# Altium PCB Localization.PcbDoc (part 1 of 2)
Units mil, origin at the board's own origin, x right, y up, seen from the top; angles counter-clockwise.
Board outline 3937.01 x 3937.01 mil, 4 copper layers (Top Layer, GND, POWER, GND_2), stack 23.756 mil thick; 104 components, 64 nets, 363 pads, 70 vias.
Unrouted connection lines stored in the file: 17.
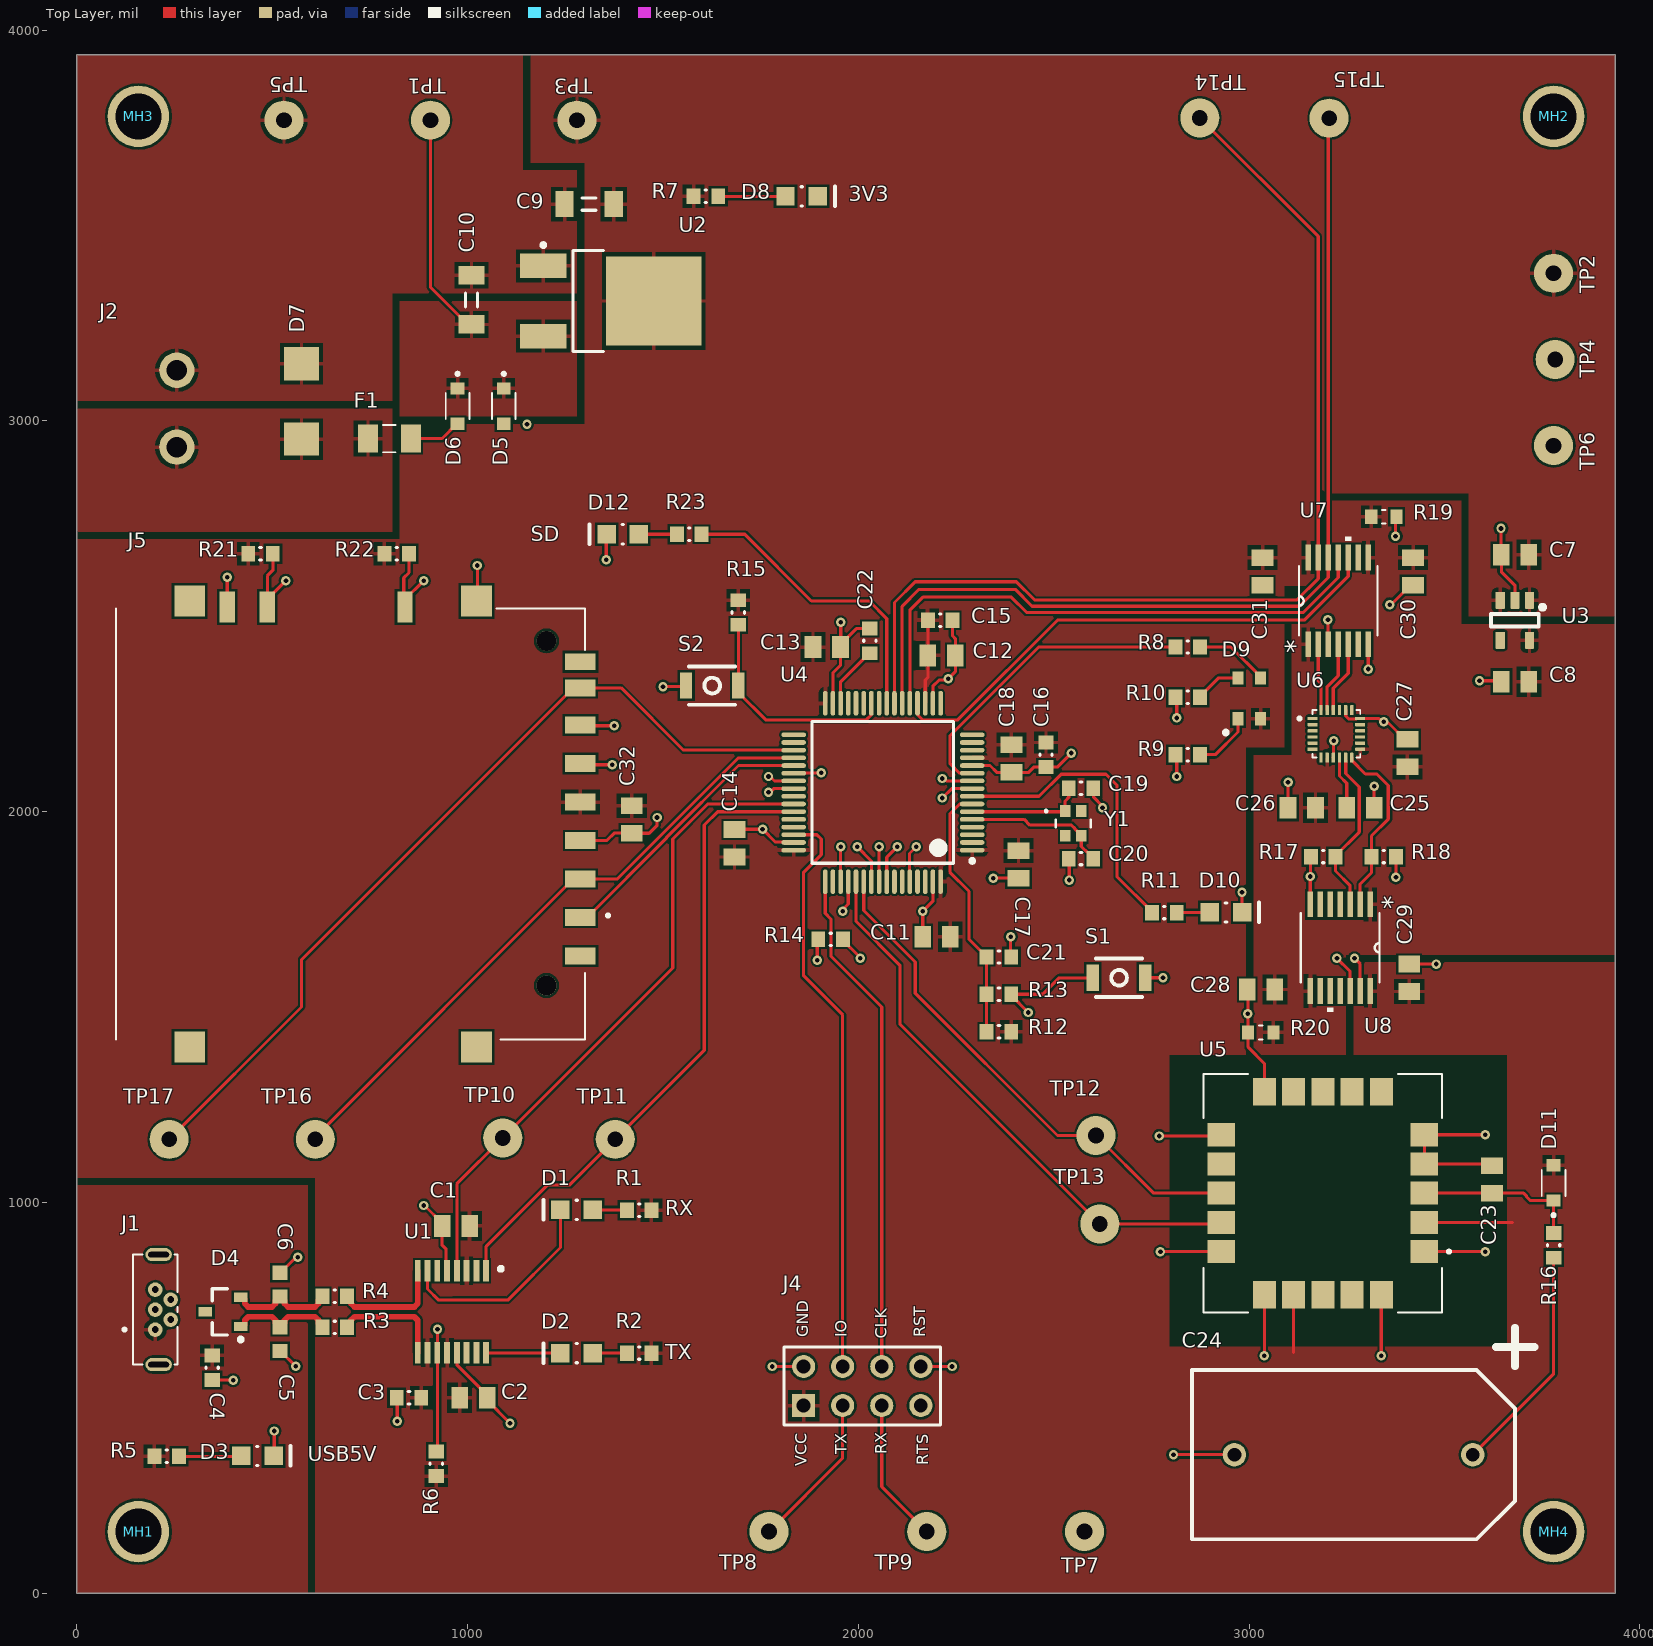
[diagram p0: Top Layer view]
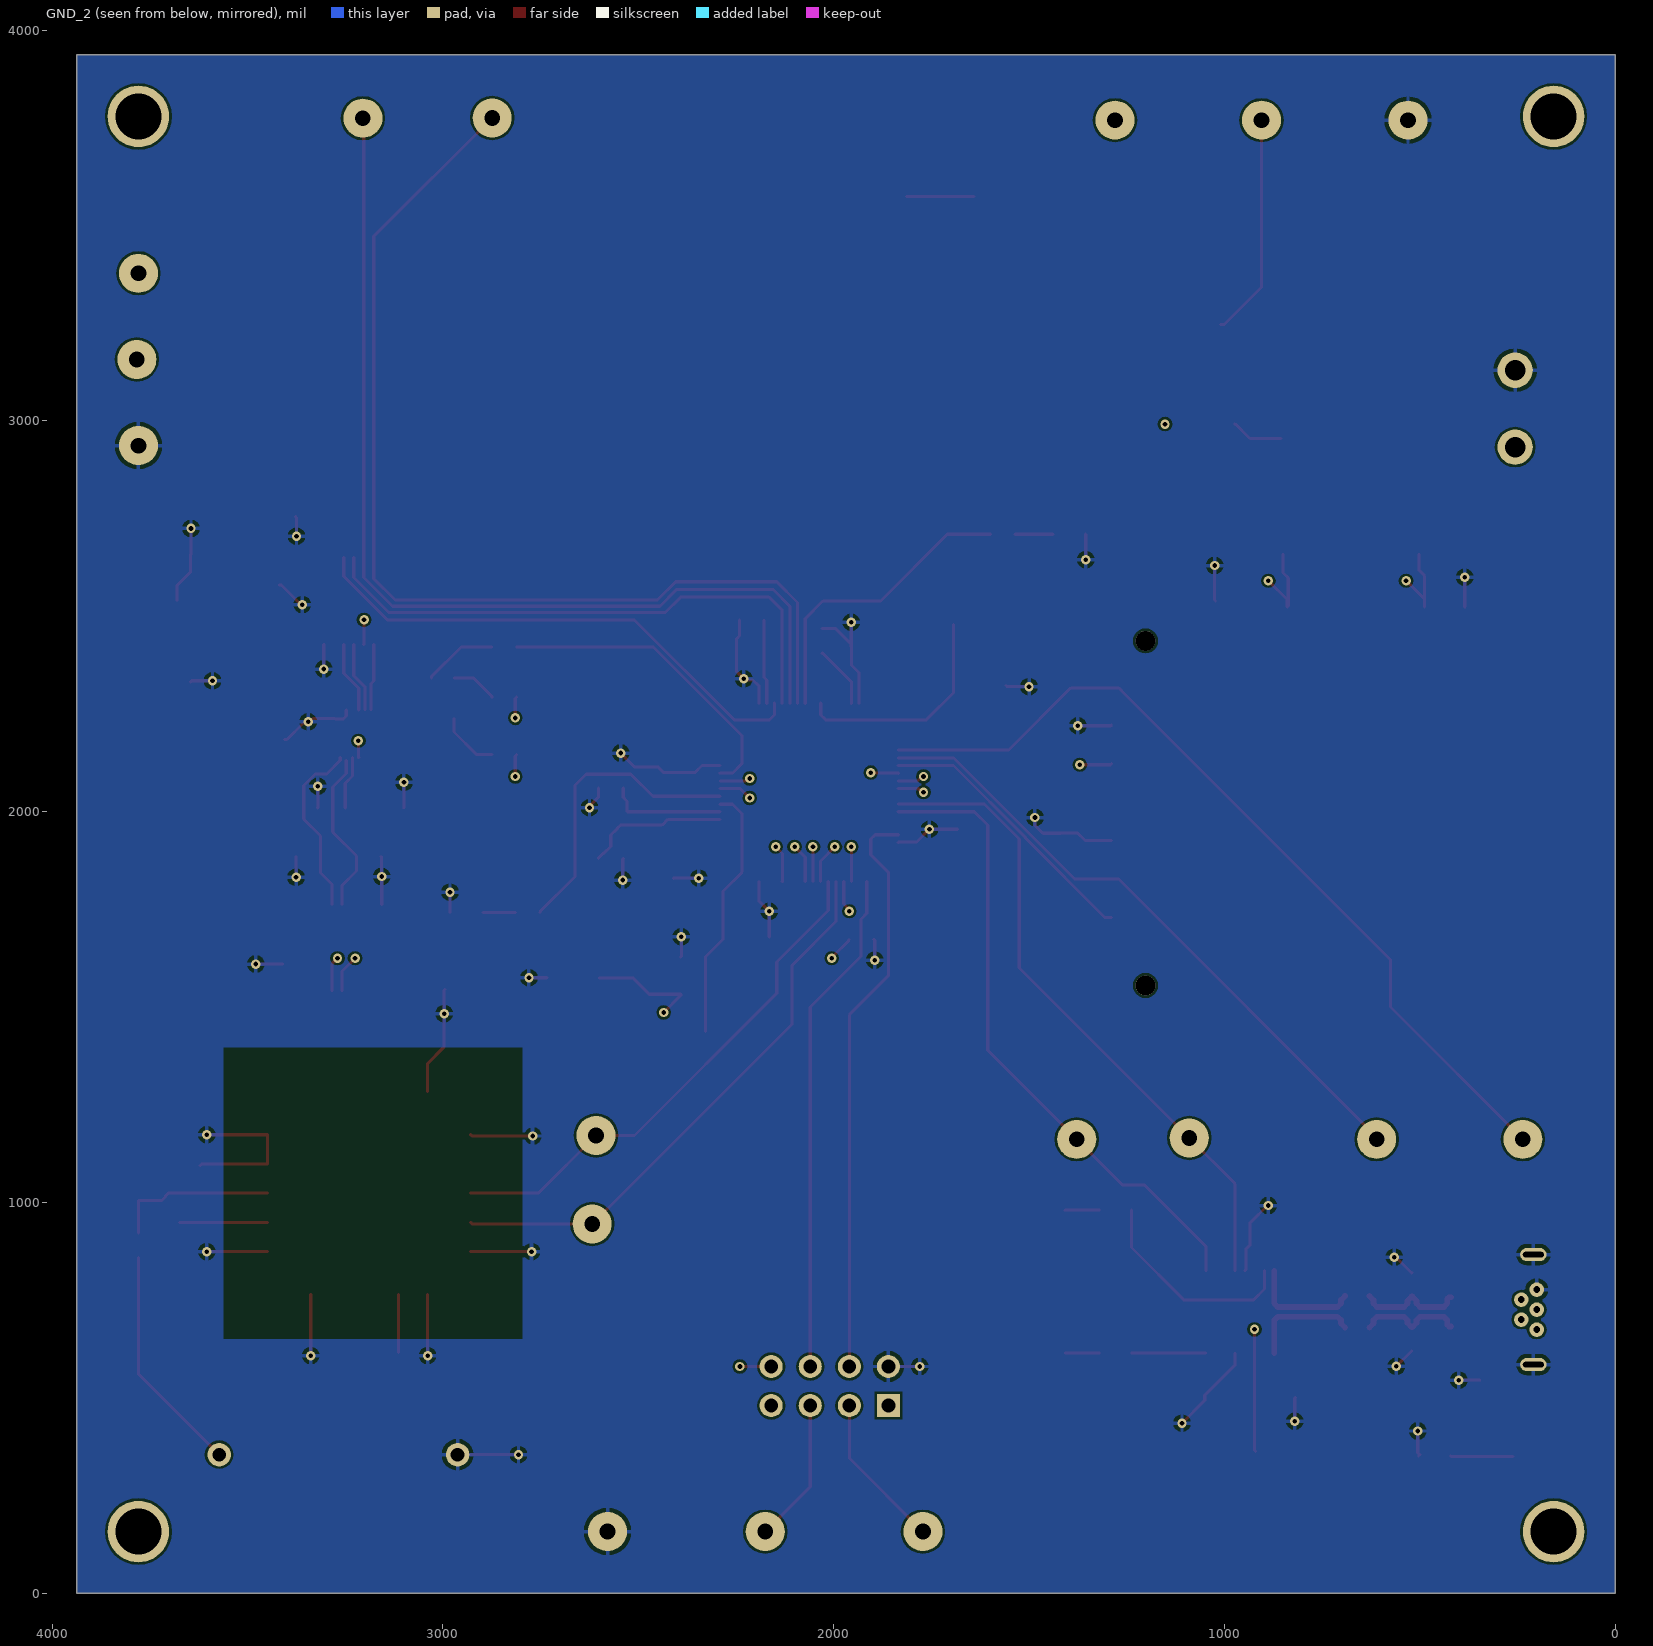
[diagram p1: GND_2 view, seen from below]
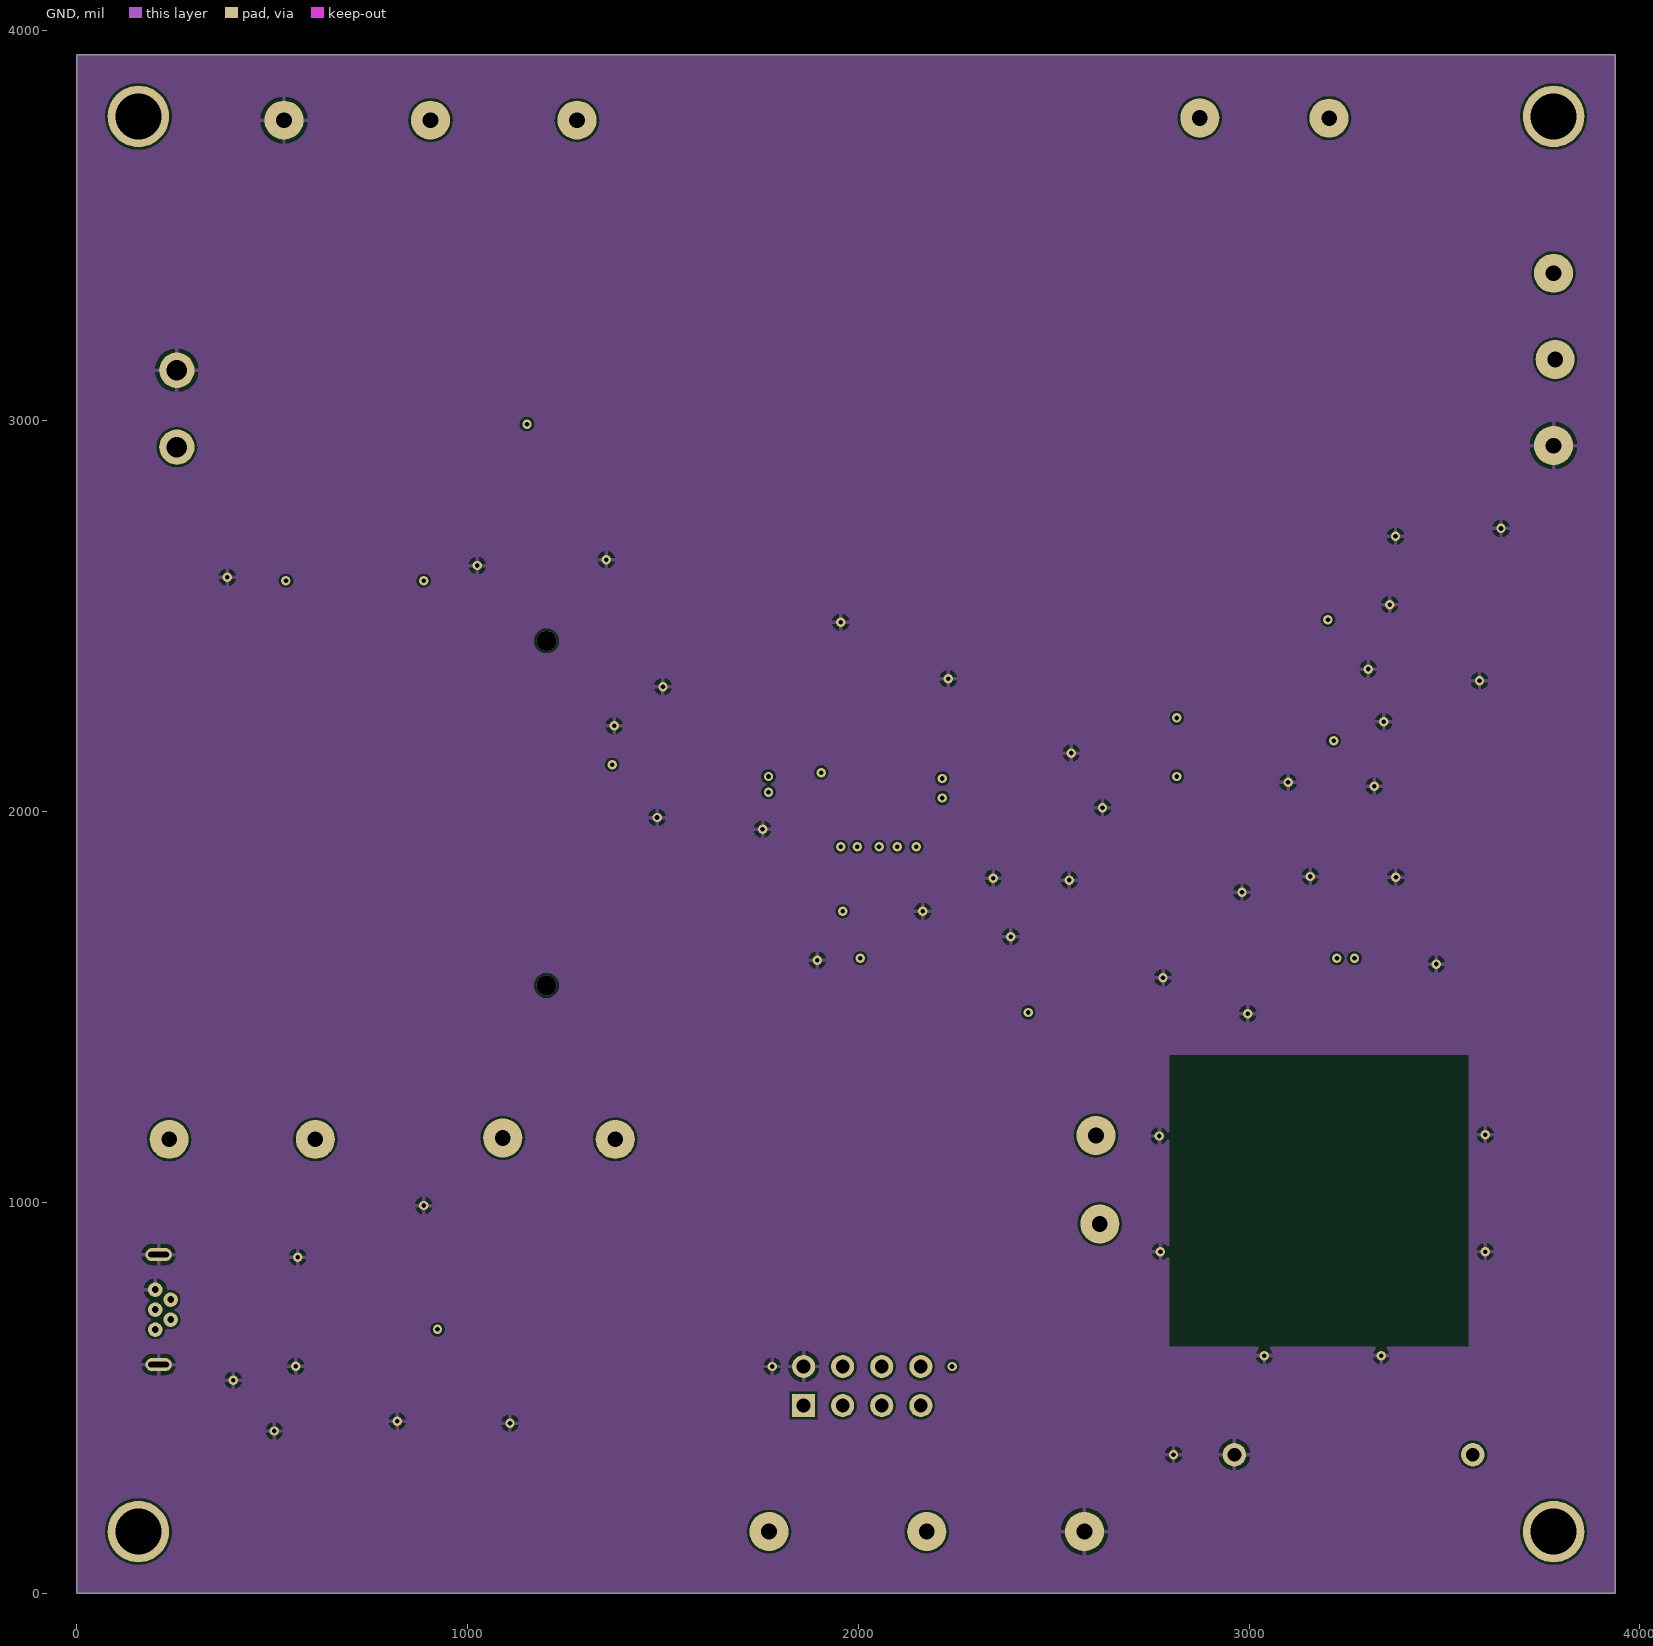
[diagram p2: GND]
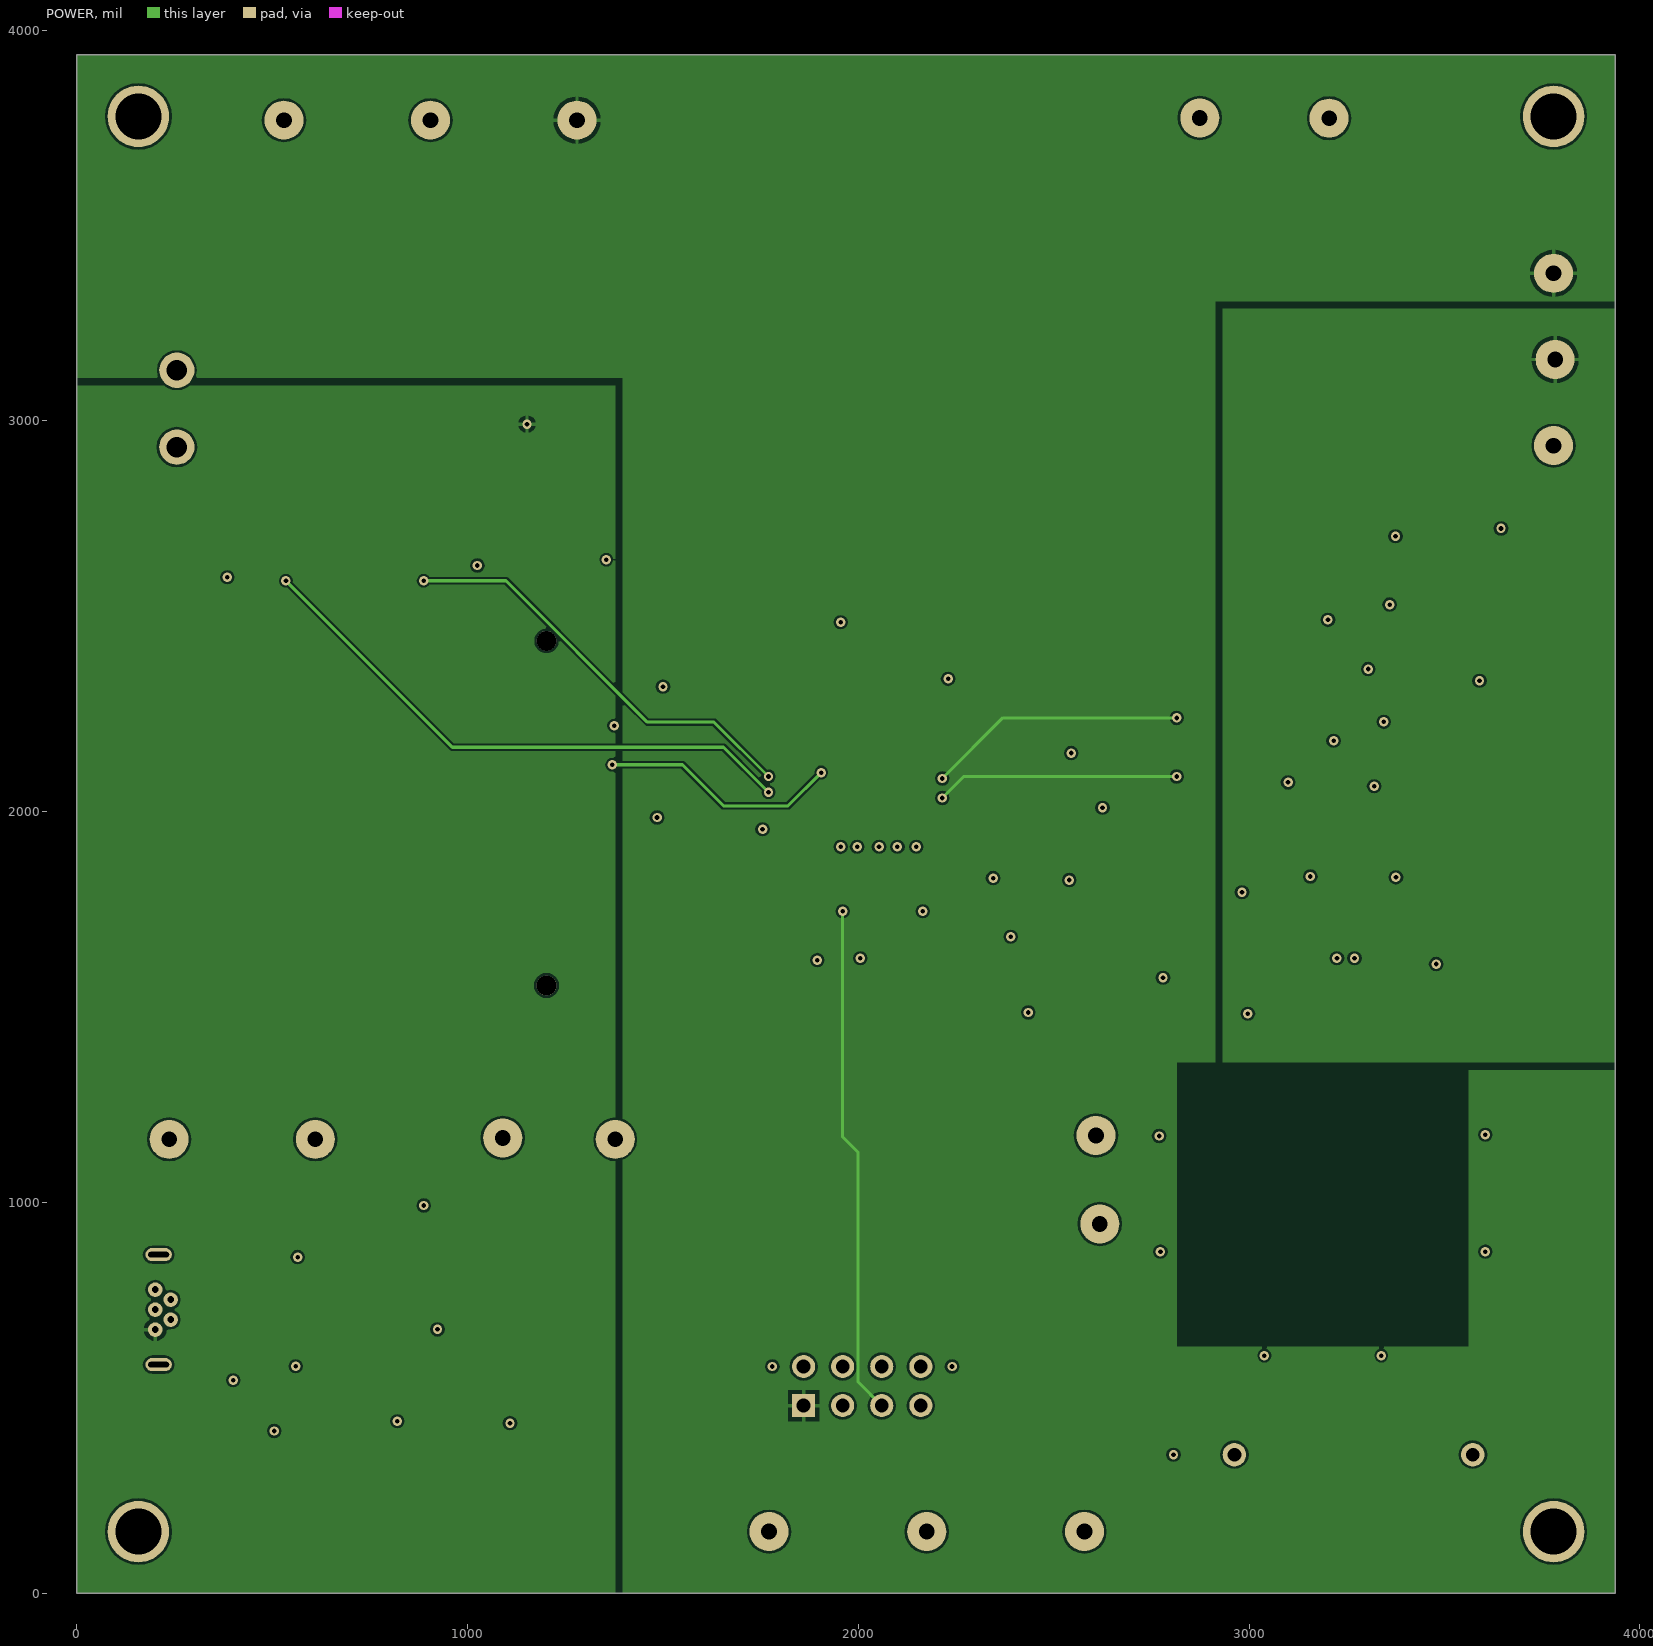
[diagram p3: POWER]
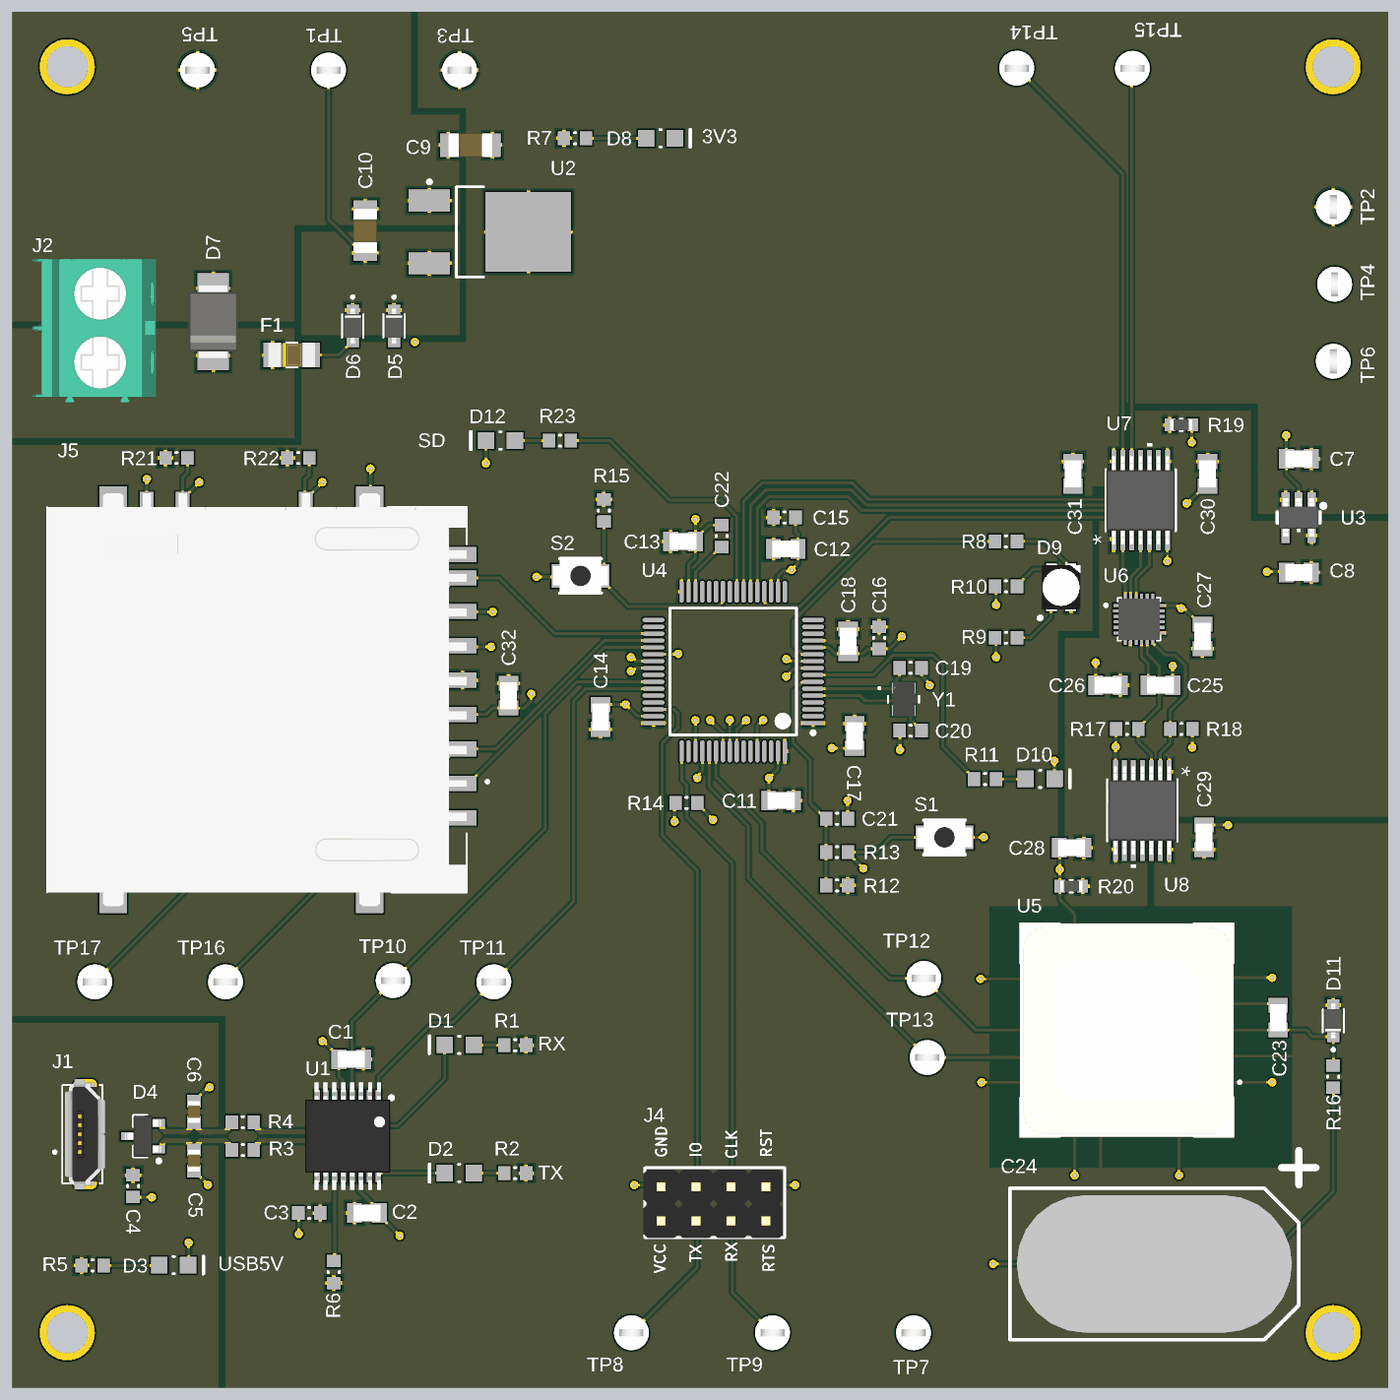
[diagram p4: 3D render of the assembled board from above, using the file's embedded part models]

## Layer stack, top to bottom
Top Solder: solder mask 0.4, Solder Resist, Dk 3.5
Top Layer: signal copper 1.4
Dielectric 2: prepreg 2.8, PP-006, Dk 4.1
GND: signal copper 1.378
Dielectric 1: dielectric 12.6, FR-4, Dk 4.8
POWER: signal copper 1.378
Dielectric 3: prepreg 2.8, PP-006, Dk 4.1
GND_2: signal copper 1.4
Bottom Solder: solder mask 0.4, Solder Resist, Dk 3.5

## Board outline
0,0 3937.01,0 3937.01,3937.01 0,3937.01

## Design rules (kind name [scope] priority, off if disabled: settings)
Clearance [All] p1: gap=6 ignorepadtopadclearanceinfootprint=FALSE
DiffPairsRouting [All] p1: maxlimit=10 minlimit=10 mostfreqgap=10 toplayer_minwidth=15 toplayer_maxwidth=15 toplayer_prefwidth=15 midlayer1_minwidth=15 midlayer1_maxwidth=15 midlayer1_prefwidth=15 midlayer2_minwidth=15 midlayer2_maxwidth=15 midlayer2_prefwidth=15 bottomlayer_minwidth=15 bottomlayer_maxwidth=15 bottomlayer_prefwidth=15 maxuncoupledlength=500
PolygonConnect [All] p1: connectstyle=Relief reliefconductorwidth=10 reliefentries=4 polygonreliefangle="90 Angle" airgapwidth=10
RoutingVias [All] p1: holewidth=28 width=50 viastyle="Through Hole" minholewidth=28 minwidth=50 maxholewidth=28 maxwidth=50
SolderMaskExpansion [All] p1: expansion=4 istentingtop=FALSE
Width [All] p1: maxlimit=8 minlimit=8 preferedwidth=8 minimp=50.000000 maximp=50.000000 favimp=50.000000
29 further rules are at their usual default settings.

## Classes and differential pairs
component class USB: C1 C2 C3 C4 C5 C6 D1 D2 D3 D4 J1 R1 R2 R3 R4 R5 R6 U1
component class SD_CARD: C32 D12 J5 R21 R22 R23 TP16 TP17
component class Power: C7 C8 C9 C10 D5 D6 D7 D8 F1 J2 R7 TP1 TP3 TP4 TP5 U2 U3
component class MCU: C11 C12 C13 C14 C15 C16 C17 C18 C19 C20 C21 C22 D9 D10 J4 MH1 MH2 MH3 MH4 R8 R9 R10 R11 R12 R13 R14 R15 S1 S2 TP5 TP6 TP8 TP9 TP10 TP11 U4 Y1
component class IMU: C25 C26 C27 C28 C29 C30 C31 R17 R18 R19 R20 TP14 TP15 U6 U7 U8
component class GPS: C23 C24 D11 R16 TP12 TP13 U5
differential pair USBD: +USBD_P -USBD_N
differential pair USBD_R: +USBD_R_P -USBD_R_N

## Components (designator, comment, footprint, x,y, rotation, side; value= is the part's Value field where it differs from the comment)
C1 "CAP_0.1uF_50V_0805" CAPC2012X140N 970,940 r0 top value=0.1uF
C2 "CAP_0.1uF_50V_0805" CAPC2012X140N 1014.92,500 r180 top value=0.1uF
C3 "CAP_4.7uF_0603" CAPC0603(1608)55_N 850,500 r180 top value=4.7uF
C4 "CAP_10nF_0603" CAPC0603(1608)55_N 346,577 r270 top value=10nF
C5 "CAP_47pF_100V_0603" CAPC1608X87N 520,650 r90 top value=47pF
C6 "CAP_47pF_100V_0603" CAPC1608X87N 520,789.49 r90 top value=47pF
C7 "CAP_0.1uF_50V_0805" CAPC2012X140N 3681.1,2657.48 r0 top value=0.1uF
C8 "CAP_0.1uF_50V_0805" CAPC2012X140N 3681.1,2332.68 r0 top value=0.1uF
C9 "10uF" CAPC1206(3216) 1311.02,3555.12 r0 top
C10 "10uF" CAPC1206(3216) 1010,3310 r270 top
C11 "CAP_0.1uF_50V_0805" CAPC2012X140N 2200,1680 r0 top value=0.1uF
C12 "CAP_0.1uF_50V_0805" CAPC2012X140N 2213.27,2400 r180 top value=0.1uF
C13 "CAP_0.1uF_50V_0805" CAPC2012X140N 1919.29,2421.26 r180 top value=0.1uF
C14 "CAP_0.1uF_50V_0805" CAPC2012X140N 1683.07,1919.29 r270 top value=0.1uF
C15 "CAP_4.7uF_0603" CAPC0603(1608)55_N 2209.53,2490 r180 top value=4.7uF
C16 "CAP_1uF_16V_0603" CAPC0603(1608)55_N 2480.32,2145.67 r90 top value=1uF
C17 "CAP_0.1uF_50V_0805" CAPC2012X140N 2410,1865 r90 top value=0.1uF
C18 "CAP_0.1uF_50V_0805" CAPC2012X140N 2391.73,2135.83 r90 top value=0.1uF
C19 "CL10C140JB8NNNC" CAPC0603(1608)55_N 2570,2060 r180 top value=14pF
C20 "CL10C140JB8NNNC" CAPC0603(1608)55_N 2570,1880 r0 top value=14pF
C21 "CAP_4.7uF_0603" CAPC0603(1608)55_N 2360,1628.19 r180 top value=4.7uF
C22 "CAP_4.7uF_0603" CAPC0603(1608)55_N 2029.7,2437.06 r270 top value=4.7uF
C23 "CAP_0.1uF_50V_0805" CAPC2012X140N 3622.05,1058.86 r270 top value=0.1uF
C24 "CAP_2.5F_5V" SCMS22C255PRBA0 3267.72,354.33 r180 top
C25 "CAP_0.1uF_50V_0805" CAPC2012X140N 3285.24,2010 r0 top value=0.1uF
C26 "CAP_0.1uF_50V_0805" CAPC2012X140N 3135,2010 r0 top value=0.1uF
C27 "CAP_0.1uF_50V_0805" CAPC2012X140N 3405.51,2149.8 r270 top value=0.1uF
C28 "CAP_0.1uF_50V_0805" CAPC2012X140N 3030.79,1544.8 r0 top value=0.1uF
C29 "CAP_0.1uF_50V_0805" CAPC2012X140N 3410,1575 r270 top value=0.1uF
C30 "CAP_0.1uF_50V_0805" CAPC2012X140N 3420,2615 r90 top value=0.1uF
C31 "CAP_0.1uF_50V_0805" CAPC2012X140N 3034.84,2615 r90 top value=0.1uF
C32 "CAP_0.1uF_50V_0805" CAPC2012X140N 1420,1980 r90 top value=0.1uF
D1 "DIO_LED_G" LED_0805_LINE 1279.06,981 r180 top
D2 "DIO_LED_Y" LED_0805_LINE 1279.06,614.21 r180 top
D3 "DIO_LED_R" LED_0805_LINE 462.05,351.07 r0 top
D4 "TVS_DIODE_USB_5.5V" SOT23-3 374,720 r180 top
D5 "DIO_SCHOTTKY_30V_800mA" DIO_CUS520,H3F 1092.52,3038.03 r270 top
D6 "DIO_SCHOTTKY_30V_800mA" DIO_CUS520,H3F 974.41,3038.03 r270 top
D7 "TVS_DIODE_BIDIRECTIONAL" TVS_DIODE_BIDIRECTIONAL 575,3050 r90 top
D8 "DIO_LED_G" LED_0805_LINE 1855,3575 r0 top
D9 "LED_RGB" LED_RGB 3000.67,2290.23 r0 top
D10 "DIO_LED_G" LED_0805_LINE 2940.94,1742.13 r0 top
D11 "DIO_SCHOTTKY_30V_800mA" DIO_CUS520,H3F 3779.53,1050 r90 top
D12 "DIO_LED_G" LED_0805_LINE 1397.17,2710 r180 top
F1 "FUSE_1A_1206" FUSC3215X78N 800,2955 r0 top
J1 "614105150721" USB_CON 200.63,725.59 r90 top
J2 "CON_2M_TERM" 1935161 255.91,3031.5 r270 top
J4 "HEADER 4X2" HEADER_2X4 1860,480 r0 top
J5 "SD_CARD_CON" HRS_DM1AA-SF-PEJ(21) 700,2000 r270 top
MH1 "MOUNTING_HOLES" MOUNTING_HOLE#1 157.48,157.48 r0 top
MH2 "MOUNTING_HOLES" MOUNTING_HOLE#2 3818.9,3818.9 r0 top
MH3 "MOUNTING_HOLES" MOUNTING_HOLE#1 157.48,3779.53 r0 top
MH4 "MOUNTING_HOLES" MOUNTING_HOLE#1 3779.53,157.48 r0 top
R1 "RES_1K_0603" RESC0603(1608)_N 1439.06,980 r0 top value=1K
R2 "RES_1K_0603" RESC0603(1608)_N 1439.06,614.21 r0 top value=1K
R3 "RES_27R_0603" RESC0603(1608)_N 660,680 r0 top
R4 "RES_27R_0603" RESC0603(1608)_N 660,760 r0 top
R5 "RES_1K_0603" RESC0603(1608)_N 230,350 r180 top value=1K
R6 "RES_10K_0603" RESC0603(1608)_N 920,330.94 r270 top value=10K
R7 "RES_120R_0603" RESC0603(1608)_N 1610,3575 r180 top value=120
R8 "RES_20R_0603" RESC0603(1608)_N 2843.27,2421.54 r180 top value=20R
R9 "RES_120R_0603" RESC0603(1608)_N 2843.27,2145.95 r0 top value=120
R10 "RES_20R_0603" RESC0603(1608)_N 2843.27,2293.06 r180 top value=20R
R11 "RES_120R_0603" RESC0603(1608)_N 2783.46,1741.65 r0 top value=120
R12 "RES_10K_0603" RESC0603(1608)_N 2360,1437.01 r0 top value=10K
R13 "RES_1K_0603" RESC0603(1608)_N 2360,1532.6 r180 top value=1K
R14 "RES_10K_0603" RESC0603(1608)_N 1929.13,1673.23 r180 top value=10K
R15 "RES_10K_0603" RESC0603(1608)_N 1692.91,2509.84 r270 top value=10K
R16 "RES_1K_0603" RESC0603(1608)_N 3779.53,890 r270 top value=1K
R17 "RES_10K_0603" RESC0603(1608)_N 3190,1885 r0 top value=10K
R18 "RES_10K_0603" RESC0603(1608)_N 3345,1885 r180 top value=10K
R19 "RES_51K_0603" RESC1608X55N 3345,2755 r180 top value=51K
R20 "RES_51K_0603" RESC1608X55N 3030,1435 r0 top value=51K
R21 "RES_10K_0603" RESC0603(1608)_N 470,2660 r180 top value=10K
R22 "RES_10K_0603" RESC0603(1608)_N 818.5,2660 r180 top value=10K
R23 "RES_120R_0603" RESC0603(1608)_N 1567.17,2710 r180 top value=120
S1 "SW_TACTILE" B3U-1100P 2667.32,1574.8 r180 top
S2 "SW_TACTILE" B3U-1100P 1625.98,2322.83 r180 top
TP1 "5V" TESTPOINT_LOOP 905,3770 r0 top
TP2 "3V3" TESTPOINT_LOOP 3779.53,3377.95 r90 top
TP3 "3V3" TESTPOINT_LOOP 1280,3770 r0 top
TP4 "1V8" TESTPOINT_LOOP 3783.46,3157.48 r90 top
TP5 "GND" TESTPOINT_LOOP 530,3770 r180 top
TP6 "GND" TESTPOINT_LOOP 3779.53,2937.01 r270 top
TP7 "GND" TESTPOINT_LOOP 2578.74,157.48 r180 top
TP8 "DEBUG_TX" TESTPOINT_LOOP 1771.65,157.48 r180 top
TP9 "DEBUG_RX" TESTPOINT_LOOP 2175.2,157.48 r180 top
TP10 "USB_TX" TESTPOINT_LOOP 1090,1165 r0 top
TP11 "USB_RX" TESTPOINT_LOOP 1377.95,1161.42 r0 top
TP12 "GPS_RX" TESTPOINT_LOOP 2608.27,1171.26 r180 top
TP13 "GPS_TX" TESTPOINT_LOOP 2618.11,944.88 r180 top
TP14 "IMU_MOSI" TESTPOINT_LOOP 2874.02,3775.59 r180 top
TP15 "IMU_MISO" TESTPOINT_LOOP 3205,3775 r180 top
TP16 "SD_MOSI" TESTPOINT_LOOP 610.24,1161.42 r0 top
TP17 "SD_MISO" TESTPOINT_LOOP 236.22,1161.42 r0 top
U1 "IC_USB_TRANSCEIVER" SSOP-16 960,720 r180 top
U2 "5V0_3V3_LDO" VOLTAGE_REGULATOR 1303.54,3307.09 r270 top
U3 "LDO_1.8V_250mA" LP5907MFX-1.8/NOPB 3680.47,2489.84 r270 top
U4 "STM32F446RET6" STM-LQFP64_L 2062.99,2049.21 r180 top
U5 "SAM-M8Q" XCVR_SAM-M8Q 3188.98,1023.62 r180 top
U6 "IC_9DOF_IMU" ICM-20948 3223.62,2199.17 r0 top
U7 "TXB0104PWR" PW14 3228.35,2539.37 r90 top
U8 "TXB0104PWR" PW14 3233.35,1651.89 r270 top
Y1 "CRYSTAL_25MHZ" SMD-4_2P5X2_AVX 2550,1970 r0 top

## Footprints (in the part's own frame and the unit in brackets; to place one, negate y for a bottom-side part, rotate by r counter-clockwise, add the part's x,y. Pads: shape width x height; smd on the part's side, far side on the other; paste and mask are expansions set on the pad)
1935161 [mm]
  round 2.3 hole 1.325: 1(-2.5,0) 2(2.5,0)
  body extent -5.01,-5.06 5.39,3.94, height 11.41
B3U-1100P [mm] "TACTILE SWITCH GREY"
  rect 0.8x1.7 smd: 1(-1.7,0) 2(1.7,0)
  silkscreen extent -1.5,-1.25 1.5,1.25, body extent -2,-1.25 2,1.25, height 1.6
CAPC0603(1608)55_N [mm] "Chip Capacitor, Body 1.6x0.8mm, Height 0.55mm, IPC Medium Density"
  rect 0.9x1 smd: 1(-0.8,0) 2(0.8,0)
  silkscreen extent -0.05,-0.4 0.05,0.4, body extent -0.87,-0.48 0.88,0.47, height 0.55
CAPC1206(3216) [mm] "Chip Capacitor, Body 3.2x1.6mm, Height 0.55mm, IPC Medium Density"
  rect 1.2x1.7 smd: 1(-1.6,0) 2(1.6,0)
  silkscreen extent -0.45,-0.4 0.45,0.4, body extent -1.6,-0.85 1.6,0.85, height 1.75
CAPC1608X87N [mm]
  rect 0.92x0.97 smd: 1(-0.775,0) 2(0.775,0)
  body extent -0.8,-0.44 0.8,0.43, height 0.79
CAPC2012X140N [mm]
  rect 1.08x1.42 smd: 1(-0.895,0) 2(0.895,0)
  body extent -1,-0.62 1,0.62, height 1.4
DIO_CUS520,H3F [mm]
  rect 0.8x0.9 smd: 1(1.15,0) 2(-1.15,0)
  silkscreen extent -2.2,-0.77 0.85,0.77, body extent -1.25,-0.62 1.25,0.63, height 1.15
FUSC3215X78N [mm]
  rect 1.32x1.8 smd: 1(-1.395,0) 2(1.395,0)
  silkscreen extent -0.41,-0.89 0.41,0.89, body extent -1.7,-0.89 1.7,0.89, height 0.79
HEADER_2X4 [mm]
  rect 1.5x1.5 hole 0.9: 1(0,0)
  round 1.5 hole 0.9: 2(2.54,0) 3(5.08,0) 4(7.62,0) 5(0,2.54) 6(2.54,2.54) 7(5.08,2.54) 8(7.62,2.54)
  silkscreen extent -1.27,-1.27 8.89,3.81, body extent -1.36,-1.32 8.8,3.67, height 8.54
HRS_DM1AA-SF-PEJ(21) [mm]
  rect 1.1x2 smd: 1(6.875,14.95) 2(4.375,14.95) 3(1.875,14.95) 4(-0.625,14.95) 5(-3.125,14.95) 6(-5.625,14.95) 7(-8.05,14.95) 8(-9.75,14.95) 9(9.375,14.95)
  rect 2x1 smd: 10(-13.3,3.55) 11(-13.3,-5.4) 12(-13.3,-8)
  rect 2x2 smd: 13(-13.7,8.2) 14(-13.7,-10.45) 15(15.3,-10.45) 16(15.3,8.2)
  round 1.3 hole 1.3 unplated: ""(-11.1,12.75) ""(11.3,12.75)
  silkscreen extent -13.2,-15.25 14.8,16.85, body extent -14.2,-15.24 15.8,15.26, height 2.9
ICM-20948 [mm] "24-QFN"
  rrect25% 0.64x0.22 smd: 1(-1.55,0.6) 1(-1.545,-1) 1(-1.545,-0.6) 1(-1.545,-0.2) 1(-1.545,0.2) 1(-1.545,1) 1(1.545,-0.6) 1(1.545,-0.2) 1(1.545,0.2) 1(1.545,0.6) 13(1.545,-1) 18(1.545,1)
  rrect25% 0.22x0.64 smd: 7(-1,-1.545) 8(-0.6,-1.545) 9(-0.2,-1.545) 10(0.2,-1.545) 11(0.6,-1.545) 12(1,-1.545) 19(1,1.545) 20(0.6,1.545) 21(0.2,1.545) 22(-0.2,1.545) 23(-0.6,1.545) 24(-1,1.545)
  silkscreen extent -2.5,-1.55 1.55,1.55, body extent -1.5,-1.5 1.5,1.5, height 1.06
LED_0805_LINE [mm] "SMD, 2-Leads, Body 2x1.25mm"
  rect 1.2x1.2 smd: 1(-1.05,0) 2(1.05,0)
  silkscreen extent -0.05,-0.63 2.16,0.64, body extent -1,-0.63 1,0.63, height 0.8
LED_RGB [mm]
  rect 0.7x0.86 smd: 1(-0.737,-1.325) 2(-0.737,1.325) 3(0.738,1.325) 4(0.738,-1.325)
  silkscreen extent -1.65,-2.35 -1.4,-2.1, body extent -1.4,-1.75 1.4,1.75, height 1.89
LP5907MFX-1.8/NOPB [mm]
  rrect15% 1.1x0.6 smd: 1(-1.3,0.95) 2(-1.3,0) 3(-1.3,-0.95) 4(1.3,-0.95) 5(1.3,0.95)
  silkscreen extent -0.99,-1.55 0.4,1.94, body extent -1.4,-1.45 1.4,1.45, height 1.2
MOUNTING_HOLE#1 [mm]
  round 4 hole 3 unplated: 0(0,0)
MOUNTING_HOLE#2 [mm]
  round 4 hole 3 unplated: 0(-1,-1)
PW14 [mil]
  rect 66x14 smd: 1(-111,76.77) 2(-111,51.18) 3(-111,25.59) 4(-111,0) 5(-111,-25.59) 6(-111,-51.18) 7(-111,-76.77) 8(111,-76.77) 9(111,-51.18) 10(111,-25.59) 11(111,0) 12(111,25.59) 13(111,51.18) 14(111,76.77)
  silkscreen extent -88,-100 164,100, body extent -126,-98 126,98, height 44
RESC0603(1608)_N [mm] "Chip Resistor, Body 1.6x0.8mm, IPC Medium Density"
  rect 0.9x1 smd: 1(-0.8,0) 2(0.8,0)
  silkscreen extent -0.05,-0.4 0.05,0.4, body extent -0.85,-0.47 0.85,0.47, height 0.6
RESC1608X55N [mm]
  rect 0.79x0.93 smd: 1(-0.82,0) 2(0.82,0)
  silkscreen extent -0.11,-0.45 0.11,0.45, body extent -0.8,-0.4 0.8,0.4, height 0.55
SCMS22C255PRBA0 [mil]
  round 60 hole 35.43: 1(-305.12,0) 2(305.12,0)
  silkscreen extent -463,-325 413,217, body extent -394,-197 394,197, height 866
SMD-4_2P5X2_AVX [mil]
  rect 26x30 smd paste+0 mask+0: 1(-20.5,31.69) 2(-20.5,-31.69) 3(20.5,-31.69) 4(20.5,31.69)
  silkscreen extent -72,-10 44,35, body extent -33,-49 34,49, height 22
SOT23-3 [mm] "SOT23, 3-Leads, Body 2.90x2.30mm, Pitch 0.95mm, IPC Medium Density"
  rect 0.9x0.6 smd: 1(-1.15,0.95) 2(-1.15,-0.95) 3(1.15,0)
  silkscreen extent -1.28,-1.5 0.7,1.92, body extent -1.3,-1.5 1.3,1.5, height 1.1
SSOP-16 [mil]
  rect 15x55 smd: 1(-87.5,-105) 2(-62.5,-105) 3(-37.5,-105) 4(-12.5,-105) 5(12.5,-105) 6(37.5,-105) 7(62.5,-105) 8(87.5,-105) 9(87.5,105) 10(62.5,105) 11(37.5,105) 12(12.5,105) 13(-12.5,105) 14(-37.5,105) 15(-62.5,105) 16(-87.5,105)
  silkscreen extent -130,-115 -120,-105, body extent -122,-154 122,154, height 75
STM-LQFP64_L [mm] "QFP, 64-Leads, Body 10x10mm, Pitch 0.5mm, IPC High Density"
  oval 1.6x0.3 smd: 1(-5.8,3.75) 2(-5.8,3.25) 3(-5.8,2.75) 4(-5.8,2.25) 5(-5.8,1.75) 6(-5.8,1.25) 7(-5.8,0.75) 8(-5.8,0.25) 9(-5.8,-0.25) 10(-5.8,-0.75) 11(-5.8,-1.25) 12(-5.8,-1.75) 13(-5.8,-2.25) 14(-5.8,-2.75) 15(-5.8,-3.25) 16(-5.8,-3.75) 33(5.8,-3.75) 34(5.8,-3.25) 35(5.8,-2.75) 36(5.8,-2.25) 37(5.8,-1.75) 38(5.8,-1.25) 39(5.8,-0.75) 40(5.8,-0.25) 41(5.8,0.25) 42(5.8,0.75) 43(5.8,1.25) 44(5.8,1.75) 45(5.8,2.25) 46(5.8,2.75) 47(5.8,3.25) 48(5.8,3.75)
  oval 0.3x1.6 smd: 17(-3.75,-5.8) 18(-3.25,-5.8) 19(-2.75,-5.8) 20(-2.25,-5.8) 21(-1.75,-5.8) 22(-1.25,-5.8) 23(-0.75,-5.8) 24(-0.25,-5.8) 25(0.25,-5.8) 26(0.75,-5.8) 27(1.25,-5.8) 28(1.75,-5.8) 29(2.25,-5.8) 30(2.75,-5.8) 31(3.25,-5.8) 32(3.75,-5.8) 49(3.75,5.8) 50(3.25,5.8) 51(2.75,5.8) 52(2.25,5.8) 53(1.75,5.8) 54(1.25,5.8) 55(0.75,5.8) 56(0.25,5.8) 57(-0.25,5.8) 58(-0.75,5.8) 59(-1.25,5.8) 60(-1.75,5.8) 61(-2.25,5.8) 62(-2.75,5.8) 63(-3.25,5.8) 64(-3.75,5.8)
  silkscreen extent -5.93,-4.6 4.6,4.6, body extent -5,-5 5,5, height 1.6
TESTPOINT_LOOP [mm]
  round 2.54 hole 1.02: 1(0,0)
  body extent -1.27,-1.27 1.27,1.27, height 4.57
TVS_DIODE_BIDIRECTIONAL [mm]
  rect 2.16x2.26 smd: 1(-2.45,0) 2(2.45,0)
  body extent -2.7,-1.8 2.7,1.8, height 2.27
USB_CON [mm] "WURTH_614105150721"
  round 0.948 hole 0.44: 1(-1.3,0) 2(-0.65,-1) 3(0,0) 4(0.65,-1) 5(1.3,0)
  oval 0.858x1.716 hole 0.35 slot 1.35 at 90 deg: SH1(-3.575,-0.22) SH2(3.575,-0.22)
  silkscreen extent -3.57,-1.45 3.57,2.1, body extent -4,-1.64 4,1.26, height 5.62
VOLTAGE_REGULATOR [mm] "DPAK, 3-Leads, Body 6.095x6.54mm, Pitch 4.57mm"
  rect 1.6x3 smd: 1(-2.285,-2.79) 3(2.285,-2.79)
  rect 5.8x6.2 smd: 2(0,4.39)
  silkscreen extent -3.76,-2.91 3.27,1.14, body extent -3.27,-0.84 3.27,5.25, height 2.38
XCVR_SAM-M8Q [mm]
  rect 1.8x1.5 smd paste-2: 1(-6.6,3.8) 2(-6.6,1.9) 3(-6.6,0) 4(-6.6,-1.9) 5(-6.6,-3.8) 11(6.6,-3.8) 12(6.6,-1.9) 13(6.6,0) 14(6.6,1.9) 15(6.6,3.8)
  rect 1.5x1.8 smd paste-2: 6(-3.8,-6.6) 7(-1.9,-6.6) 8(0,-6.6) 9(1.9,-6.6) 10(3.8,-6.6) 16(3.8,6.6) 17(1.9,6.6) 18(0,6.6) 19(-1.9,6.6) 20(-3.8,6.6)
  silkscreen extent -8.3,-7.75 7.75,7.75, body extent -7.75,-7.75 7.75,7.75, height 6.41

## Part data
C1 C2 C7 C8 C11 C12 C13 C14 C17 C18 C23 C25 C26 C27 C28 C29 C30 C31 C32: "CAP CER 0.1UF 50V X7R 0805", Capacitance=100nF, Case Code (Imperial)=0805, Case Code (Metric)=2012, Dielectric=X7R, Manufacturer 1="Murata Electronics", Manufacturer Part Number 1=GCD21BR71H104KA01L, Max Operating Temperature=125°C, Min Operating Temperature=-55°C, Ratings=AEC-Q200, Supplier Part Number 1=490-11955-1-ND, Tolerance=10%, Voltage Rating=50V, Case/Package=0805, ComponentLink1Description=https://datasheet.ciiva.com/29537/c03e-29537701.pdf?src-supplier=Digi-Key, ComponentLink1URL=https://datasheet.ciiva.com/29537/c03e-29537701.pdf?src-supplier=Digi-Key, Depth=1.25mm, Height=1.25mm, Length=2mm, Mount="Surface Mount", Supplier 1=Digi-Key, Termination=SMD/SMT, Thickness=0.049inch, Width=0.049inch
C3 C15 C21 C22: "CAP CER 4.7UF 6.3V X5R 0603", Manufacturer 1=Yageo, Manufacturer Part Number 1=CC0603KRX5R5BB475, Package="0603 (1608 Metric)", Supplier Part Number 1=311-1521-1-ND, Temperature Coefficient=X5R, Voltage Rating=6.3V, Dimensions="0.063\" L x 0.031\" W (1.60mm x 0.80mm)", Mount="Surface Mount", Supplier 1=Digi-Key
C4: "CAP CER 10000PF 16V X7R 0603", Manufacturer 1=Yageo, Manufacturer Part Number 1=CC0603KRX7R7BB103, Package="0603 (1608 Metric)", Supplier Part Number 1=311-3369-1-ND, Temperature Coefficient=X7R, Voltage Rating=16V, Dimensions="0.063\" L x 0.031\" W (1.60mm x 0.80mm)", Mount="Surface Mount", Supplier 1=Digi-Key
C5 C6: "CAP CER 47PF 100V C0G/NP0 0603", Manufacturer 1=KEMET, Manufacturer Part Number 1=C0603C470J1GACTU, Package="0603 (1608 Metric)", Supplier Part Number 1=399-7917-1-ND, Temperature Coefficient=C0G, Voltage Rating=100V, Dimensions="0.063\" L x 0.031\" W (1.60mm x 0.80mm)", Mount="Surface Mount", Supplier 1=Digi-Key
C9 C10: library part CAP_10uF_50V_1206, "CAP CER 10UF 50V X5R 1206", Manufacturer 1=Murata, Manufacturer Part Numer 1=GRT31CR61H106KE01L, Package="1206 (3216 Metric)", Supplier Part Number 1=490-12456-1-ND, Voltage Rating=50V, Dimensions="0.126\" L x 0.063\" W (3.20mm x 1.6mm)", Mount="Surface Mount", Supplier 1=Digi-Key
C16: "CAP CER 1UF 16V Y5V 0603", Manufacturer 1=Yageo, Manufacturer Part Number=CC0603ZRY5V7BB105, Package="0603 (1608 Metric)", Supplier Part Number 1=311-1372-1-ND, Temperature Coefficient=Y5V, Voltage Rating=16V, Dimensions="0.063\" L x 0.031\" W (1.60mm x 0.80mm)", Mount="Surface Mount", Supplier 1=Digi-Key
C19 C20: "Cap Ceramic 14pF 50V C0G 5% SMD 0603 125C Cardboard T/R", Capacitance=14pF, Case Code (Imperial)=0603, Case Code (Metric)=1608, Dielectric=C0G, Manufacturer 1=Samsung, Max Operating Temperature=125°C, Min Operating Temperature=-55°C, Package Quantity=1, Supplier Part Number 1=1276-2187-1-ND, Tolerance=5%, Voltage Rating=50V, Case/Package=0603, ComponentLink1Description=https://datasheet.ciiva.com/25782/cl10c140jb8nnnc-25782947.pdf?src-supplier=Digi-Key, ComponentLink1URL=https://datasheet.ciiva.com/25782/cl10c140jb8nnnc-25782947.pdf?src-supplier=Digi-Key, Depth=0.8mm, Height=0.8mm, Length=1.6mm, Manufacturer Part Number 1=CL10C140JB8NNNC, Mount="Surface Mount", Packaging="Tape and Reel", Pricing 1="1=0.10000, 10=0.06700, 100=0.02980, 500=0.02130, 1000=0.01673 (USD)", Radiation Hardening=No, RoHS=Yes, Stock 1=187088, Supplier 1=Digi-Key, Thickness=0.035inch, Voltage Rating (DC)=50V, Width=0.031inch
C24: "CAP 2.5F 5V", Capacitance=2.5F, Case/Package=Radial, Manufacturer 1="AVX Corporation", Manufacturer Part Number 1=SCMS22C255PRBA0, Max Operating Temperature=85°C, Min Operating Temperature=-40°C, Tolerance="0%, +100%", Voltage Rating=5V, Dimensions="0.787\" L x 0.394\" W (20.00mm x 10.00mm)", Height - Seated (Max)="0.925\" (23.50mm)", Mount="Through Hole", RoHS=Yes, Supplier 1=Digi-Key, Voltage Rating (DC)=5V
D1 D8 D10 D12: "LED GREEN DIFFUSED 0805 SMD", Forward Voltage Drop=2.2V, Manufacturer 1=OSRAM, Manufacturer Part Number 1="LG R971-KN-1", Package="0805 (2012 Metric)", Supplier Part Number 1=475-1410-1-ND, Mount="Surface Mount", Supplier 1=Digi-Key
D2: "LED YELLOW DIFFUSED 0805 SMD", Forward Voltage Drop=2.2V, Manufacturer 1=OSRAM, Manufacturer Part Number 1="LY R976-PS-36", Package="0805 (2012 Metric)", Supplier Part Number 1=475-2560-1-ND, Mount="Surface Mount", Supplier 1=Digi-Key
D3: "LED RED DIFFUSED 0805 SMD", Forward Voltage Drop=2V, Manufacturer 1=OSRAM, Manufacturer Part Number 1="LS R976-NR-1", Package="0805 (2012 Metric)", Supplier Part Number 1=475-1278-1-ND, Mount="Surface Mount", Supplier 1=Digi-Key
D4: "ESD Suppressor Diode Arrays 8KV 3-Pin SOT-23 T/R", Breakdown Voltage=7V, Capacitance=0.9pF, Case/Package=SOT-23, Clamping Voltage=8V, Current Rating=100nA, Manufacturer="Texas Instruments", Manufacturer Part Number=TPD2E009DBZR, Max Operating Temperature=85°C, Max Power Dissipation=45W, Min Breakdown Voltage=9V, Min Operating Temperature=-40°C, Operating Supply Voltage=6V, Package Quantity=1, Peak Pulse Current=1A, Power Line Protection=Yes, Reverse Standoff Voltage=5.5V, Supplier Part Number 1=296-24657-1-ND, Category="Interface ICs", ComponentLink1Description=https://datasheet.ciiva.com/353/tpd2e009-353266.pdf?src-supplier=Digi-Key, ComponentLink1URL=https://datasheet.ciiva.com/353/tpd2e009-353266.pdf?src-supplier=Digi-Key, ComponentLink2Description=https://datasheet.ciiva.com/15134/getdatasheetpartid-243395-15134537.pdf?src-supplier=Verical, ComponentLink2URL=https://datasheet.ciiva.com/15134/getdatasheetpartid-243395-15134537.pdf?src-supplier=Verical, ComponentLink3Description=https://datasheet.ciiva.com/4479/slvs953a-121037-4479453.pdf?src-supplier=Mouser, ComponentLink3URL=https://datasheet.ciiva.com/4479/slvs953a-121037-4479453.pdf?src-supplier=Mouser, ComponentLink4Description=https://datasheet.ciiva.com/353/tpd2e009-353268.pdf?src-supplier=Digi-Key, ComponentLink4URL=https://datasheet.ciiva.com/353/tpd2e009-353268.pdf?src-supplier=Digi-Key, ComponentLink5Description=https://datasheet.ciiva.com/353/tpd2e009-353267.pdf?src-supplier=Digi-Key, ComponentLink5URL=https://datasheet.ciiva.com/353/tpd2e009-353267.pdf?src-supplier=Digi-Key, ComponentLink6Description=https://datasheet.ciiva.com/46384/1707898-46384524.pdf?src-supplier=Element14, ComponentLink6URL=https://datasheet.ciiva.com/46384/1707898-46384524.pdf?src-supplier=Element14, Depth=1.3mm, Direction=Unidirectional, Element Configuration=Dual, Height=1mm, Interface=LVDS,PCIe,SATA, Lead Free="Lead Free", Length=2.92mm, Number of Bidirectional Channels=2, Number of Channels=2, Number of Pins=3, Packaging="Tape and Reel", Peak Pulse Power=45W, Pricing 1="1=0.56000, 10=0.48000, 25=0.44800, 100=0.33280, 250=0.31616, 500=0.25984, 1000=0.21120 (USD)", Radiation Hardening=No, REACH SVHC="No SVHC", RoHS=Yes, Stock 1=98615, Supplier 1=Digi-Key, Termination=SMD/SMT, Width=1.3mm, Working Voltage=5.5V
D5 D6 D11: "DIODE SCHOTTKY 30V 800MA USC", Manufacturer 1="Toshiba Semiconductor and Storage", Manufacturer Part Number 1=CUS08F30,H3F, Supplier Part Number 1=CUS08F30H3FCT-ND, Io=800mA, Mount="Surface Mount", Supplier 1=Digi-Key, Vf (Max)=220mV, Vr (Max)=30V
D7: "TVS DIODE 5V 9.2V DO214AA", Breakdown Voltage=6.4V, Case/Package=SMB, Clamping Voltage=9.2V, Leakage Current=1.6mA, Manufacturer="Nexperia USA Inc.", Manufacturer 1=Littelfuse, Manufacturer Part Number 1=SMBJ5.0CA, Max Breakdown Voltage=7V, Max Operating Temperature=150°C, Max Power Dissipation=5W, Max Surge Current=65.3A, Min Operating Temperature=-65°C, Operating Supply Voltage=5V, Package="SC-70, SOT-323", Package Quantity=3000, Peak Pulse Power=600W, Power Line Protection=No, Supplier Part Number 1=SMBJ5.0CALFCT-ND, Test Current=10mA, ComponentLink1Description=Datasheet, ComponentLink1URL=https://www.littelfuse.com/~/media/electronics/datasheets/tvs_diodes/littelfuse_tvs_diode_smbj_datasheet.pdf.pdf, Composition=Zener, Direction=Bidirectional, Element Configuration=Single, ESD Protection=Yes, Height=0.096inch, Lead Free="Lead Free", Length=0.179inch, Max Reverse Leakage Current=1.6mA, Min Breakdown Voltage=6.4V, Mount="Surface Mount", Number of Bidirectional Channels=1, Number of Channels=1, Number of Elements=1, Number of Pins=2, Packaging="Tape and Reel", Peak Pulse Current=65.3A, Polarity=Bidirectional, Power Dissipation=600W, Pricing 1="1=0.39000, 10=0.31300, 25=0.28640, 100=0.17980, 250=0.17784, 500=0.16650, 1000=0.11322 (USD)", Radiation Hardening=No, REACH SVHC="No SVHC", Reverse Breakdown Voltage=6.4V, Reverse Standoff Voltage=5V, Stock 1=23233, Supplier 1=Digi-Key, Voltage Rating (DC)=5V, Width=0.155inch
D9: "LED RGB DIFFUSED 4PLCC SMD", Case/Package=PLCC, Color=Blue,Green,Red, Forward Voltage=3.1V, Lens Color=White, Manufacturer 1=Broadcom, Manufacturer Part Number 1=ASMB-MTB1-0A3A2, Supplier Part Number 1=516-3280-1-ND, Test Current=20mA, ComponentLink1Description=http://www.farnell.com/datasheets/2111106.pdf?src-supplier=Farnell, ComponentLink1URL=http://www.farnell.com/datasheets/2111106.pdf?src-supplier=Farnell, ComponentLink2Description=https://docs.broadcom.com/docs/AV02-4194EN?src-supplier=Digi-Key, ComponentLink2URL=https://docs.broadcom.com/docs/AV02-4194EN?src-supplier=Digi-Key, ComponentLink3Description=http://www.farnell.com/datasheets/1801564.pdf?src-supplier=Element14, ComponentLink3URL=http://www.farnell.com/datasheets/1801564.pdf?src-supplier=Element14, ComponentLink4Description=http://www.farnell.com/datasheets/2111106.pdf?src-supplier=Newark, ComponentLink4URL=http://www.farnell.com/datasheets/2111106.pdf?src-supplier=Newark, Dominant Wavelength=470nm, Height=1.9mm, Length=3.2mm, Lens Style=Round, Lens Transparency=Diffused, Luminous Intensity=350mcd, Mount="Surface Mount", Number of Pins=4, Packaging="Cut Tape", Pricing 1="1=0.60000, 10=0.47100, 100=0.30210, 500=0.25980, 1000=0.20059 (USD)", REACH SVHC="No SVHC", RoHS=Yes, Stock 1=142531, Supplier 1=Digi-Key, Viewing Angle=115°, Width=2.8mm
F1: "FUSE BOARD MOUNT 1A 125VAC 63VDC", Current Rating=1A, Manufacturer 1="Bel Fuse Inc.", Manufacturer Part Number 1="C1Q 1", Supplier Part Number 1=507-1077-1-ND, Voltage Rating DC=63V, Mount="Surface Mount", Supplier 1=Digi-Key
J1: library part USB_CON, "USB - micro B USB 2.0 Receptacle Connector 5 Position Through Hole", Manufacturer 1="Wurth Electronics", Package=None, Supplier Part Number 1=732-5958-1-ND, Digi-Key_Purchase_URL=https://www.digikey.com/product-detail/en/w-rth-elektronik/614105150721/732-5958-1-ND/5047553?utm_source=snapeda&utm_medium=aggregator&utm_campaign=symbol, Manufacturer Part Number 1=614105150721, SnapEDA_Link=https://www.snapeda.com/parts/614105150721/Wurth%20Electronics%20Inc./view-part/1118291/?ref=snap, Supplier 1=Digi-Key
J2: "TERM BLK 2POS SIDE ENTRY 5MM", Color=Green, Current=18A, Current Rating=17.5A, Flammability Rating="UL94 V-0", Manufacturer 1="Phoenix Contact", Manufacturer Part Number 1=1935161, Max Current Rating=16A, Max Supply Voltage=250V, Package Quantity=250, Supplier Part Number 1=277-1667-ND, Voltage=300V, Voltage Rating (DC)=320V, Approvals=UL, ComponentLink1Description=https://datasheet.ciiva.com/15169/getdatasheetpartid-177903-15169663.pdf?src-supplier=Verical, ComponentLink1URL=https://datasheet.ciiva.com/15169/getdatasheetpartid-177903-15169663.pdf?src-supplier=Verical, ComponentLink2Description=https://datasheet.ciiva.com/16047/1935161-16047247.pdf?src-supplier=Onlinecomponents.com, ComponentLink2URL=https://datasheet.ciiva.com/16047/1935161-16047247.pdf?src-supplier=Onlinecomponents.com, ComponentLink3Description=https://datasheet.ciiva.com/824/combiconcompact5-0mmseries-824222.pdf?src-supplier=Digi-Key, ComponentLink3URL=https://datasheet.ciiva.com/824/combiconcompact5-0mmseries-824222.pdf?src-supplier=Digi-Key, Connector Type=Screw, Contact Material=Copper,Tin, Depth=9mm, Height=11.3mm, Housing Color=Green, Housing Material=Polyamide, Insulation Material=Nylon, Lead Free="Lead Free", Length=9mm, Material=Nylon, Mount="Through Hole", Number of Circuits=2, Number of Contacts=2, Number of Levels=1, Number of Pins=2, Number of Poles=2, Number of Positions=2, Number of Positions Per Level=2, Number of Rows=1, Orientation=Straight, Packaging=Bulk, Pitch=5mm, Pricing 1="1=0.43000, 10=0.41100, 50=0.39280, 100=0.38200, 250=0.35700, 500=0.32844, 1000=0.30350 (USD)", Radiation Hardening=No, REACH SVHC=Unknown, RoHS=Yes, Stock 1=15494, Supplier 1=Digi-Key, Termination=Solder, Voltage Rating=250V, Weight=0.067021oz, Width=14.9mm, Wire Gauge (Max)=26AWG, Wire Gauge (Min)=12AWG, Wire/Cable Gauge=26AWG
J4: "CONN HEADER VERT 8POS 2.54MM", Manufacturer 1="Harwin Inc.", Manufacturer Part Number 1=M20-9980445, Supplier Part Number 1=952-2122-ND, Mount="Through Hole", Supplier 1=Digi-Key
J5: "12 _9 + 3_ Position Card Connector Secure Digital - SD Surface Mount, Right Angle Gold", Manufacturer 1="Hirose Electric Co Ltd", Manufacturer Part Number 1=DM1AA-SF-PEJ(21), Supplier Part Number 1=HR845CT-ND, Card Type=SD, Mount="Surface Mount", Supplier 1=Digi-Key
MH1 MH2 MH3 MH4: "6cm x 6cm"
R1 R2 R5 R13 R16: "RES SMD 1K OHM 5% 1/10W 0603", Manufacturer 1=Yageo, Manufacturer Part Number 1=RC0603JR-071KL, Package="0603 (1608 Metric)", Supplier Part Number 1=311-1.0KGRCT-ND, Tolerance=5%, Dimensions="0.063\" L x 0.031\" W (1.60mm x 0.80mm)", Mount="Surface Mount", Supplier 1=Digi-Key
R3 R4: "RES SMD 27 OHM 5% 1/10W 0603", Case Code (Imperial)=0603, Case Code (Metric)=1608, Manufacturer=Yageo, Manufacturer Part Number=RC0603JR-0727RL, Max Operating Temperature=155°C, Min Operating Temperature=-55°C, Power Rating=100mW, Resistance=27R, Supplier Part Number 1=311-27GRCT-ND, Temperature Coefficient=100ppm/°C, Tolerance=5%, Voltage Rating=50V, Case/Package=0603, Category="Chip SMD Resistors", ComponentLink1Description=https://datasheet.ciiva.com/7746/443971-7746479.pdf?src-supplier=Element14, ComponentLink1URL=https://datasheet.ciiva.com/7746/443971-7746479.pdf?src-supplier=Element14, Composition="Thick Film", Depth=0.8mm, Lead Free="Lead Free", Length=1.6mm, Military Standard=Not, Number of Pins=2, Packaging="Tape and Reel", Pricing 1="1=0.10000, 10=0.01900, 100=0.00770, 1000=0.00347, 2500=0.00301 (USD)", REACH SVHC="No SVHC", RoHS=Yes, Stock 1=2055343, Supplier 1=Digi-Key, Termination=SMD/SMT, Voltage Rating (DC)=50V, Width=0.8mm
R6 R12 R14 R15 R17 R18 R21 R22: "RES SMD 10K OHM 5% 1/10W 0603", Manufacturer 1=Yageo, Manufacturer Part Number 1=RC0603JR-0710KL, Package="0603 (1608 Metric)", Supplier Part Number 1=311-10KGRCT-ND, Tolerance=5%, Dimensions="0.063\" L x 0.031\" W (1.60mm x 0.80mm)", Mount="Surface Mount", Supplier 1=Digi-Key
R7 R9 R11 R23: "RES SMD 120 OHM 5% 1/10W 0603", Manufacturer 1=Yageo, Manufacturer Part Number 1=RC0603JR-07120RL, Package="0603 (1608 Metric)", Supplier Part Number 1=311-120GRCT-ND, Tolerance=5%, Dimensions="0.063\" L x 0.031\" W (1.60mm x 0.80mm)", Mount="Surface Mount", Supplier 1=Digi-Key
R8 R10: "RES SMD 20 OHM 5% 1/10W 0603", Manufacturer 1=Yageo, Manufacturer Part Number 1=RC0603JR-0720RL, Package="0603 (1608 Metric)", Supplier Part Number 1=311-20GRCT-ND, Tolerance=5%, Dimensions="0.063\" L x 0.031\" W (1.60mm x 0.80mm)", Mount="Surface Mount", Supplier 1=Digi-Key
R19 R20: "RES SMD 51K OHM 5% 1/10W 0603", Manufacturer 1=Yageo, Manufacturer Part Number 1=RC0603JR-0751KL, Package="0603 (1608 Metric)", Supplier Part Number 1=311-51KGRCT-ND, Tolerance=5%, Dimensions="0.063\" L x 0.031\" W (1.60mm x 0.80mm)", Mount="Surface Mount", Supplier 1=Digi-Key
S1 S2: "Tactile Switch (Grey)", Manufacturer 1="Omron Electronics Inc-EMC Div", Manufacturer Part Number 1=B3U-1100P, Supplier Part Number 1=SW1021CT-ND, Mount="Surface Mount", Supplier 1=Digi-Key
TP1 TP2 TP3 TP4 TP5 TP6 TP7 TP8 TP9 TP10 TP11 TP12 TP13 TP14 TP15 TP16 TP17: library part TESTPOINT_LOOP, "Loop testpoint through-hole pad", Manufacturer 1="Keystone Electronics", Manufacturer Part Number 1=5002, Supplier Part Number 1=36-5002-ND, Mount="Through Hole", Supplier 1=Digi-Key
U1: Manufacturer 1="FTDI, Future Technology Devices International Ltd", Manufacturer Part Number 1=FT230XS-R, Supplier Part Number 1=768-1135-1-ND, Supplier 1=Digi-Key
U2: "IC REG LINEAR 3.3V 1A DPAK", Current Output=1A, Manufacturer 1="ON Semiconductor", Manufacturer Part Number 1=NCP1117DT33T5G, Supplier Part Number 1=NCP1117DT33T5GOSCT-ND, Mount="Surface Mount", Supplier 1=Digi-Key
U3: "IC REG LINEAR 1.8V 250MA SOT23-5", Current Output=250mA, Manufacturer 1="Texas Instruments", Manufacturer Part Number 1=LP5907MFX-1.8/NOPB, Supplier Part Number 1=296-41463-1-ND, Mount="Surface Mount", Supplier 1=Digi-Key
U4: library part MCU_STM32F446RET6, "ARM Cortex-M4 32-bit MCU+FPU, 512 KB Flash, 128 KB Internal RAM, 50 I/Os, 64-Pin LQFP, -40 to 85 degC, Tray", I/Os (High Current)=50, Operating Frequency(F) (Processor speed) (MHz)=180, Package Description=LQFP64, Package Reference="64-Pin Low-profile Quad Flat Package, Body 10 x 10 mm, Pitch 0.5 mm", Supplier Part Number 1=497-15376-ND, Supply Voltage(Vcc) min (V)=1.7, ComponentLink1Description="Manufacturer URL", ComponentLink1URL=http://www.st.com/, ComponentLink2Description=Datasheet, ComponentLink2URL=http://www.st.com/st-web-ui/static/active/en/resource/technical/document/datasheet/DM00141306.pdf, Core="ARM Cortex-M4", D/A Converter=2, DatasheetVersion="Rev. 6", FLASH Size (Prog) (kB)=512, Internal RAM Size (kB)=128, Mounting Technology="Surface Mount", Packing=Tray, Supplier 1=Digi-Key
U5: "Rf Rx Galileo 1.575GHZ/1.602GHZ", Case/Package=SMD/SMT, Frequency=1.602GHz, Manufacturer 1=u-blox, Manufacturing Part Number 1=SAM-M8Q-0-10, Max Operating Temperature=85°C, Min Operating Temperature=-40°C, Supplier Part Number 1=672-1054-1-ND, ComponentLink1Description=https://www.u-blox.com/sites/default/files/SAM-M8Q_ProductSummary_%28UBX-15027452%29.pdf?src-supplier=Digi-Key, ComponentLink1URL=https://www.u-blox.com/sites/default/files/SAM-M8Q_ProductSummary_%28UBX-15027452%29.pdf?src-supplier=Digi-Key, ComponentLink2Description=https://www.u-blox.com/sites/default/files/SAM-M8Q_DataSheet_%28UBX-16012619%29.pdf?src-supplier=Digi-Key, ComponentLink2URL=https://www.u-blox.com/sites/default/files/SAM-M8Q_DataSheet_%28UBX-16012619%29.pdf?src-supplier=Digi-Key, Data Rate=400Kbps, Interface=I2C,SPI,USB,UART, Packaging="Tape and Reel", Pricing 1="1=25.00000, 10=20.24400, 50=16.62160, 100=13.26160 (USD)", RoHS=No, Sensitivity=-165dBm, Stock 1=2191, Supplier 1=Digi-Key
U6: "IMU ACCEL/GYRO/COMPI2C/SPI 24QFN", Case/Package=QFN, Manufacturer="TDK InvenSense", Manufacturer Part Number=ICM-20948, Max Operating Temperature=85°C, Min Operating Temperature=-40°C, Supplier Part Number 1=1428-1123-1-ND, Category="Inertial Measurement Units (IMUs)", ComponentLink1Description=http://www.farnell.com/datasheets/2632662.pdf?src-supplier=Farnell, ComponentLink1URL=http://www.farnell.com/datasheets/2632662.pdf?src-supplier=Farnell, ComponentLink2Description=https://www.invensense.com/wp-content/uploads/2016/06/App-Note-eMD-20x48-User-Guide.pdf?src-supplier=Digi-Key, ComponentLink2URL=https://www.invensense.com/wp-content/uploads/2016/06/App-Note-eMD-20x48-User-Guide.pdf?src-supplier=Digi-Key, ComponentLink3Description=https://www.invensense.com/wp-content/uploads/2016/06/App-Note-eMD-20x48-User-Guide.pdf?src-supplier=Avnet+Europe, ComponentLink3URL=https://www.invensense.com/wp-content/uploads/2016/06/App-Note-eMD-20x48-User-Guide.pdf?src-supplier=Avnet+Europe, ComponentLink4Description=http://www.farnell.com/datasheets/2632662.pdf?src-supplier=Element14, ComponentLink4URL=http://www.farnell.com/datasheets/2632662.pdf?src-supplier=Element14, ComponentLink5Description=https://www.invensense.com/wp-content/uploads/2016/06/App-Note-eMD-20x48-User-Guide.pdf?src-supplier=Avnet, ComponentLink5URL=https://www.invensense.com/wp-content/uploads/2016/06/App-Note-eMD-20x48-User-Guide.pdf?src-supplier=Avnet, ComponentLink6Description=https://www.invensense.com/wp-content/uploads/2016/06/App-Note-eMD-20x48-User-Guide.pdf?src-supplier=Component+Distributors+Inc., ComponentLink6URL=https://www.invensense.com/wp-content/uploads/2016/06/App-Note-eMD-20x48-User-Guide.pdf?src-supplier=Component+Distributors+Inc., Mount="Surface Mount", Output Type=SPI,I2C, Packaging="Tape and Reel", Pricing 1="1=8.04000, 5=7.09600, 10=6.26700, 25=5.08480, 50=4.49360, 100=4.37530, 500=3.66576, 1000=3.42925 (USD)", RoHS=No, Sensor Type=Accelerometer,Gyroscope,Magnetometer, Stock 1=21985, Supplier 1=Digi-Key
U7 U8: library part IC_4CH_LVL_SHIFTER, "4-Bit Bidirectional Voltage-Level Translator with Auto Direction Sensing / VCCA < VCCB, see datasheet", Manufacturer 1="Texas Instruments", PACKAGE_DESIGNATOR=PW, Supplier Part Number 1=296-21929-1-ND, Datasheet_URL=http://www.ti.com/lit/gpn/TXB0104, FAMILY_NAME="AUTO DIRECTION SENSING DUAL SUPPLY TRANSLATOR", GENERIC_PART_NUMBER=TXB0104, INDUSTRY_STD_PKG_TYPE=TSSOP, Manufacturer Part Number 1=TXB0104PWR, PIN_COUNT=14, Supplier 1=Digi-Key, VCCA MAX="3.6 V", VCCB MAX="5.5 V"
Y1: "CRYSTAL 25.0000MHZ 12PF SMD", Case/Package=SMD/SMT, ESR (Equivalent Series Resistance)=80R, Frequency=25MHz, Frequency Stability=15ppm, Frequency Tolerance=10ppm, Load Capacitance=12pF, Manufacturer 1="Kyocera AVX", Manufacturer Part Number 1=CX2520DB25000H0FLJC1, Max Operating Temperature=85°C, Min Operating Temperature=-30°C, Ratings=AEC-Q200, Supplier Part Number 1=1253-1724-1-ND, ComponentLink1Description=https://media.digikey.com/pdf/Data%20Sheets/AVX%20PDFs/CX2520DB_USY1M-H1-16429-00_Spec.pdf?src-supplier=Digi-Key, ComponentLink1URL=https://media.digikey.com/pdf/Data%20Sheets/AVX%20PDFs/CX2520DB_USY1M-H1-16429-00_Spec.pdf?src-supplier=Digi-Key, Height=0.022inch, Length=0.098inch, Mount="Surface Mount", Packaging="Tape and Reel", Pricing 1="1=0.72000, 10=0.63300, 50=0.59120, 100=0.52250, 500=0.49500, 1000=0.41250 (USD)", RoHS=Yes, Stock 1=11741, Supplier 1=Digi-Key, Width=0.079inch

## Via types
v1: diameter 24, hole 12, Top Layer to GND_2, 70 vias

## Nets (pads, with @x,y where several pads share a name; then routed paths per layer and width w, separated by ;. In a path a pad name is that pad's centre, name@x,y a point inside that pad or via, vN(x,y) a via of type N, cw(c..) or ccw(c..) an arc to the next point about the centre after c; other vN are vias at no path point)
1V8: C8.2 C26.2 C27.2 C28.2 C30.2 R19.2 R20.2 TP4.1 U3.5 U6.8 U6.13 U7.1 U7.8 U8.1 U8.8
3V3: C1.2 C2.2 C3.1 C7.2 C9.2 C11.2 C12.2 C13.2 C14.2 C15.2 C16.2 C17.2 C18.2 C29.2 C31.2 C32.2 D9.4 D11.1 J4.1 J5.4 R1.2 R2.2 R6.2 R7.2 R12.2 R15.1 R21.2 R22.2 TP2.1 TP3.1 U1.3 U1.10 U1.12 U2.2 U3.1 U3.3 U4.1 U4.13 U4.19 U4.32 U4.48 U4.64 U5.2 U5.17 U7.14 U8.14 | length 588.2
  Top Layer w8: U4.19 2171.26,2336.73 2178.03,2343.5 C12.2 C15.2 ; 3114.17,615.83 U5.17 ; U5.2 3673.82,948.82
5V: C10.2 D5.2 D6.2 TP1.1 U2.3 | length 572.3
  Top Layer w8: TP1.1 905,3342.17 1000.16,3247.01 C10.2
5V_CON: D7.1 F1.1 J2.2
BUTTON: R15.2 S2.1 U4.26 | length 577.9
  Top Layer w8: R15.2 S2.1 1692.91,2305.12 1762.97,2235.06 2020.78,2235.06 2033.12,2247.4 2033.12,2277.21 U4.26
DEBUG_RX: J4.3 TP9.1 U4.52 | length 1758.5
  Top Layer w8: v1(1960,1745) 1960,1749.33 1974.41,1763.74 U4.52 ; J4.3 2060,272.68 TP9.1
  POWER w8: v1(1960,1745) 1960,1167.24 1999.53,1127.72 1999.53,540.47 J4.3
DEBUG_TX: J4.2 TP8.1 U4.51 | length 489.8
  Top Layer w8: TP8.1 1960,345.83 J4.2 ; U4.51 1954.72,1909.72 v1(1955,1910)
GND: C1.1 C2.1 C3.2 C4.2 C5.1 C6.2 C7.1 C8.1 C9.1 C10.1 C11.1 C12.1 C13.1 C14.1 C15.1 C16.1 C17.1 C18.1 C19.1 C20.1 C21.1 C22.1 C23.1 C24.2 C25.2 C26.1 C27.1 C28.1 C29.1 C30.1 C31.1 C32.1 D3.2 D4.3 D7.2 D8.2 D10.2 D12.2 J1.5 J1.SH1 J1.SH2 J2.1 J4.5 J5.3 J5.6 J5.12 J5.13 R14.2 R17.1 R18.1 R19.1 R20.1 S1.1 S2.2 TP5.1 TP6.1 TP7.1 U1.5 U1.13 U2.1 U3.2 U4.12 U4.18 U4.31 U4.47 U4.63 U5.1 U5.4 U5.5 U5.6 U5.10 U5.11 U5.15 U5.16 U5.20 U6.18 U6.20 U7.7 U8.7 Y1.2 | length 5604.7
  Top Layer w8: C4.2 346.5,545 v1(400,545) ; v1(385,2600) 385,2523.66 J5.12 ; D3.2 500,354.46 505,359.46 v1(505,415) ; C5.1 520.98,619.49 v1(560,580.47) ; C6.2 520.98,820 560.98,860 v1(565,860) ; C3.2 820,498.5 v1(820,440) ; v1(887.9,991.94) 889.52,991.94 934.76,946.69 C1.1 934.76,890.24 945,880 945,827.5 U1.5 ; U1.13 972.5,584.35 1050.16,506.69 C2.1 1050.16,493.31 v1(1108.46,435) ; J5.13 1025,2541.54 v1(1025,2630) ; J5.3 1356.18,1926.18 1375,1945 1419.76,1945 C32.1 1464.76,1944.76 1485,1965 v1(1485,1985) ; J5.6 1290.04,2220 v1(1375,2220) ; v1(1355,2645) 1355,2709.17 D12.2 ; v1(1500,2320) 1556.22,2320 S2.2 ; C14.1 1683.54,1955 v1(1755,1955) 1788.01,1921.99 1833.92,1921.99 U4.47 ; v1(1780,580) J4.5 ; v1(1895,1620) 1895,1670.59 R14.2 ; U4.31 1935.04,2355.04 1954.53,2374.53 C13.1 1955,2421.73 C13.1@1955,2428.43 ; v1(1955,2485) C13.1@1955,2428.43 ; C22.1 1995.13,2468.56 1970.79,2444.21 C13.1@1955,2428.43 ; C11.1 2165,1680.24 v1(2165,1745) 2190.94,1770.94 U4.63 ; U4.18 2190.94,2320.94 2206.94,2336.94 2226.94,2336.94 2248.5,2358.5 C12.1 2248.5,2442.91 2241.02,2450.39 C15.1 ; U4.12 2336.89,2118.11 2354.41,2100.59 C18.1 2392.32,2100 2435,2100 2449.17,2114.17 C16.1 2509.17,2114.17 v1(2545,2150) ; v1(2345,1830) 2409.76,1830 C17.1 ; v1(2390,1680) 2390,1629.69 C21.1 ; C20.1 2540,1878.5 v1(2540,1825) ; C19.1 2601.5,2037.83 2625,2014.33 v1(2625,2010) ; S1.1 2734.45,1575 v1(2780,1575) ; v1(2770,1170) 2925.91,1170 U5.11 ; v1(2773.23,874.02) U5.15 ; v1(2806.69,354.33) C24.2 ; v1(2982,1794) 2982,1742.41 D10.2 ; C28.1 2997,1543.35 v1(2997,1483) 2997,1435.72 R20.1 2997.72,1397.28 3039.37,1355.63 U5.10 ; v1(3039.37,607.87) U5.16 ; C26.1 3100,2010.24 v1(3100,2075) ; U8.7 3156.79,1763.1 3156.79,1833.79 v1(3157,1834) 3157,1883.5 R17.1 ; U6.20 3247.57,2259.67 3247.57,2244.98 3255.15,2237.4 3275.04,2237.4 3276.18,2238.54 U6.18 3332.13,2238.54 3340.67,2230 v1(3345,2230) 3348.06,2226.94 3356.92,2226.94 3398.82,2185.04 C27.1 ; v1(3305,2365) 3305.06,2365.06 3305.06,2428.31 U7.7 ; v1(3320.23,2065.23) 3320.23,2010.24 C25.2 ; v1(3338.58,607.87) U5.20 ; v1(3360,2530) 3363.54,2530 3413.31,2579.76 C30.1 ; v1(3375,2705) 3375,2752.72 R19.1 ; v1(3376,1832) 3376,1884.5 R18.1 ; C29.1 3410.24,1610 v1(3479,1610) ; U5.1 v1(3604.72,874.02) ; v1(3590,2335) 3643.54,2335 C8.1 ; v1(3604.72,1173.23) U5.5 U5.4 3617.72,1098.43 C23.1 ; v1(3645,2725) 3645,2658.35 C7.1 3645.87,2614.13 3680.47,2579.53 U3.2
  other v1: 2230,2340
GPS_RX: TP12.1 U4.54 U5.13 | length 1335.5
  Top Layer w8: U4.54 2013.78,1747.1 2145.67,1615.21 2145.67,1535.43 2509.84,1171.26 TP12.1 2755.91,1023.62 U5.13
GPS_TX: TP13.1 U4.53 U5.14 | length 1447.1
  Top Layer w8: U4.53 1994.09,1719.42 2106.3,1607.22 2106.3,1456.69 TP13.1 2925.2,944.88 U5.14
IMU_CS_1V8: U6.22 U7.5 | length 184.2
  Top Layer w8: U6.22 3215.75,2315.89 3253.94,2354.08 U7.5
IMU_CS_3V3: U4.20 U7.10 | length 1337.6
  Top Layer w8: U4.20 2151.92,2277.21 2151.92,2247.4 2164.26,2235.06 2254.75,2235.06 2509.84,2490.16 3141.73,2490.16 3253.94,2602.37 U7.10
IMU_FSYNC_1V8: R17.2 U6.11 U8.3 | length 422.9
  Top Layer w8: U6.11@3247.5,2130.75 3247.5,2097.94 3282.26,2063.17 3282.26,1947.73 3221.5,1886.97 R17.2 3221.5,1848.32 3258.93,1810.89 U8.3
IMU_FSYNC_3V3: U4.56 U8.12 | length 187.5
  Top Layer w8: U4.56 v1(2053.15,1910.22) ; v1(3225,1625) 3258.94,1591.06 U8.12
IMU_INT_1V8: R18.2 U6.12 U8.2 | length 460.7
  Top Layer w8: U6.12 3262.99,2131.42 3297.95,2096.46 3326.77,2096.46 3356.3,2066.93 3356.3,1981.06 3313.5,1938.26 R18.2 3313.5,1844.09 3284.53,1815.11 U8.2
IMU_INT_3V3: U4.57 U8.13 | length 190.7
  Top Layer w8: U4.57 2072.83,1883.05 v1(2100,1910.22) ; v1(3270,1625) 3284.53,1610.47 U8.13
IMU_SCK_1V8: U6.23 U7.4 | length 180.1
  Top Layer w8: U6.23 3200,2319.94 3228.35,2348.29 U7.4
IMU_SCK_3V3: U4.21 U7.11 | length 1452.9
  Top Layer w8: U4.21 2131.89,2515.75 2165.35,2549.21 2391.73,2549.21 2431.1,2509.84 3138.78,2509.84 3217.53,2588.58 3228.35,2599.4 U7.11
IMU_SDI_1V8: U6.24 U7.2 | length 171.3
  Top Layer w8: U7.2 3177.17,2334.65 3184.25,2327.56 U6.24
IMU_SDI_3V3: TP14.1 U4.23 U7.13 | length 2711.2
  Top Layer w8: U4.23 2092.52,2535.43 2145.67,2588.58 2404.52,2588.58 2451.26,2541.84 3122.55,2541.84 3177.17,2596.46 U7.13 3177.17,3472.44 TP14.1
IMU_SDO_1V8: U6.9 U7.3 | length 106.5
  Top Layer w8: v1(3202,2491) 3202.38,2490.62 3202.38,2428.75 U7.3 ; U6.9 3216.08,2138.68 3216.08,2181.08 v1(3216.54,2181.54)
IMU_SDO_3V3: TP15.1 U4.22 U7.12 | length 2581.3
  Top Layer w8: U4.22 2112.2,2525.59 2155.51,2568.9 2401.57,2568.9 2444.63,2525.84 3129.18,2525.84 3202.76,2599.42 3202.76,3772.76 TP15.1
LED: R11.1 U4.8 | length 769.2
  Top Layer w8: U4.8 2462.6,2039.37 2519.12,2095.89 2634.11,2095.89 2662.24,2067.76 2662.24,1833.35 2751.97,1743.62 R11.1
LED_B: R8.2 U4.11 | length 809.4
  Top Layer w8: U4.11 2290.61,2099.15 2258.45,2099.15 2235,2122.6 2235,2195 2461.54,2421.54 R8.2
LED_G: R10.2 U4.10 | length 797.5
  Top Layer w8: v1(2215,2085) 2219.33,2085 2225.59,2078.74 U4.10 ; R10.2 2815,2289.83 v1(2815,2240)
  POWER w8: v1(2215,2085) 2370,2240 v1(2815,2240)
LED_R: R9.1 U4.9 | length 766.4
  Top Layer w8: v1(2215,2035) 2239.06,2059.06 U4.9 ; R9.1 2815,2142.72 v1(2815,2090)
  POWER w8: v1(2215,2035) 2270,2090 v1(2815,2090)
LED_RX: D1.2 U1.7 | length 550.6
  Top Layer w8: U1.7 897.5,778.5 926,750 960.16,750 1103,750 1237.72,884.72 D1.2
LED_TX: D2.2 U1.16 | length 190.5
  Top Layer w8: U1.16 1048.29,614.21 D2.2
NetC19_2: C19.2 U4.6 Y1.1 | length 300.9
  Top Layer w8: U4.6 2527.81,2000 Y1.1 2529.5,2027.53 2538.5,2036.54 C19.2
NetC20_2: C20.2 U4.5 Y1.3 | length 370.4
  Top Layer w8: U4.5 2424.41,1980.31 2439.03,1965.69 2545.67,1965.69 2554.13,1957.24 2554.13,1956.68 2570.5,1940.31 Y1.3 2570.5,1911 2586.81,1894.69 2588.78,1894.69 2601.5,1881.97 C20.2
NetC21_2: C21.2 R12.1 R13.2 U4.7 | length 663.9
  Top Layer w8: U4.7 2290.61,2018.96 2258.96,2018.96 2234.25,1994.25 2234.25,1845.28 2283.46,1796.07 2283.46,1673.23 C21.2 R13.2 R12.1
NetC22_2: C22.2 U4.30 | length 160.7
  Top Layer w8: U4.30@1955.07,2277.91 U4.30 1954.72,2332.56 2027.73,2405.57 C22.2
NetC24_1: C24.1 R16.2 | length 589.8
  Top Layer w8: C24.1 3779.53,561.02 R16.2
NetC25_1: C25.1 U6.10 | length 136
  Top Layer w8: U6.10 3231.5,2091.31 3250,2072.81 C25.1
NetD1_1: D1.1 R1.1 | length 87.6
  Top Layer w8: D1.1 1406.56,981 R1.1
NetD2_1: D2.1 R2.1 | length 87.2
  Top Layer w8: D2.1 R2.1
NetD3_1: D3.1 R5.1 | length 159.7
  Top Layer w8: R5.1 419.64,350 D3.1
NetD6_1: D6.1 F1.2 | length 135.1
  Top Layer w8: F1.2 934.68,2955 972.44,2992.76 D6.1
NetD8_1: D8.1 R7.1 | length 172.2
  Top Layer w8: R7.1 D8.1
NetD9_1: D9.1 R9.2 | length 155
  Top Layer w8: R9.2 2913.67,2145.95 2971.64,2203.92 D9.1
NetD9_2: D9.2 R10.1 | length 118.5
  Top Layer w8: R10.1 2874.76,2295.03 2922.13,2342.39 D9.2
NetD9_3: D9.3 R8.1 | length 189.6
  Top Layer w8: R8.1 2953.71,2421.54 3029.71,2345.54 D9.3
NetD10_1: D10.1 R11.2 | length 82.2
  Top Layer w8: R11.2 2815.28,1741.97 D10.1@2897.03,1741.97
NetD12_1: D12.1 R23.2 | length 97.2
  Top Layer w8: D12.1 R23.2
NetR14_1: R14.1 U4.60 | length 163.4
  Top Layer w8: R14.1 1960.63,1671.26 2005,1626.89 v1(2005,1625) ; U4.60 2131.16,1821.6 2131.16,1893.03 v1(2148.35,1910.22)
nRESET: J4.8 R13.1 S1.2 | length 372.1
  Top Layer w8: J4.8 v1(2240,580) ; v1(2435,1486.1) 2390,1531.1 R13.1 2472.15,1532.6 2514.35,1574.8 S1.2
SD_CD: J5.10 R22.1 U4.39 | length 1389.7
  Top Layer w8: R22.1 850,2611.81 836.61,2598.43 836.61,2526.77 J5.10 839.76,2543.31 v1(887.46,2591) ; v1(1770,2090) 1774.33,2090 1785.59,2078.74 U4.39
  POWER w8: v1(887.46,2591) 1098.31,2591 1460,2229.31 1630.69,2229.31 v1(1770,2090)
SD_CS: J5.1 U4.37 | length 708.1
  Top Layer w8: J5.1 1306.3,1729.33 1508.63,1931.66 1508.63,1933.43 1693.31,2118.11 U4.37
SD_LED: R23.1 U4.24 | length 780.1
  Top Layer w8: R23.1 1709.29,2710 1879.92,2539.37 2027.56,2539.37 2072.83,2494.09 U4.24
SD_MISO: J5.7 TP17.1 U4.35 | length 2213.9
  Top Layer w8: TP17.1 575,1500.2 575,1621.06 1253.21,2299.28 1270.87,2316.93 J5.7 1306.3,2316.93 1393.07,2316.93 1552.52,2157.48 U4.35
SD_MOSI: J5.2 TP16.1 U4.36 | length 1632.2
  Top Layer w8: TP16.1 610.24,1167.13 1270.87,1827.76 J5.2 1383.16,1827.76 1693.2,2137.8 U4.36
SD_SCK: J5.5 U4.38 | length 767.4
  Top Layer w8: J5.5 1291.61,2120 v1(1370,2120) ; U4.38 1835.37,2099.15 1904.15,2099.15 v1(1905,2100)
  POWER w8: v1(1370,2120) 1550,2120 1655,2015 1820,2015 v1(1905,2100)
SD_WP: J5.11 R21.1 U4.40 | length 1737
  Top Layer w8: J5.11 J5.11@487.4,2543.31 ; R21.1 501.5,2617.66 487.4,2603.56 J5.11@487.4,2543.31 ; v1(535,2590.91) J5.11@487.4,2543.31 ; v1(1770,2050) 1774.33,2050 1783.38,2059.06 U4.40
  POWER w8: v1(535,2590.91) 960.91,2165 1655,2165 v1(1770,2050)
SWD_CLK: J4.7 U4.49 | length 1300.8
  Top Layer w8: U4.49 1915.35,1739.65 1930,1725 1930,1630 2060,1500 J4.7
SWD_IO: J4.6 U4.46 | length 1484.9
  Top Layer w8: U4.46 1894.06,1940.94 1905,1930 1905,1890 1860,1845 1860,1580 1960,1480 J4.6
"USB 5V": C4.1 D5.1 J1.1 R5.2
  other v1: 1152,2992
USB_RESET: R6.1 U1.11 U4.55 | length 418.3
  Top Layer w8: R6.1 922.5,364.94 U1.11 922.75,615.25 922.75,674.75 v1(923,675) ; v1(1997,1910.22) 2033.46,1873.75 U4.55
USB_USART_RX: TP11.1 U1.1 U4.43 | length 1648.2
  Top Layer w8: U1.1 1047.5,887.5 1205,1045 1261.54,1045 TP11.1 1605.82,1389.29 1605.82,1965.82 1640,2000 U4.43
USB_USART_TX: TP10.1 U1.4 U4.42 | length 1680.6
  Top Layer w8: U1.4 972.5,1047.5 TP10.1 1525,1600 1525,1930 1614.68,2019.68 U4.42
USBD_N: R3.2 U1.9 | length 284.7
  Top Layer w15: R3.2 701.71,690.22 701.71,698.71 710.5,707.5 863.71,707.5 872.5,698.71 U1.9
USBD_P: R4.2 U1.8 | length 284.7
  Top Layer w15: R4.2 701.71,749.78 701.71,741.29 710.5,732.5 863.71,732.5 872.5,741.29 U1.8
USBD_R_N: C5.2 D4.1 J1.2 R3.1 | length 273.8
  Top Layer w15: D4.1 425.18,682.6 429.49,686.91 429.49,698.71 438.28,707.5 471.65,707.5 471.91,707.24 499.62,707.24 508.41,698.46 508.41,691.12 519.02,680.51 C5.2 520.98,680.51 531.59,691.12 531.59,698.46 540.38,707.24 586.62,707.24 586.88,707.5 609.5,707.5 618.29,698.71 618.29,690.22 R3.1
USBD_R_P: C6.1 D4.2 J1.3 R4.1 | length 273.8